# EAGLE board SparkFun RTK Facet LBand - Main-Panel (EAGLE 9.6.2), part 1 of 8
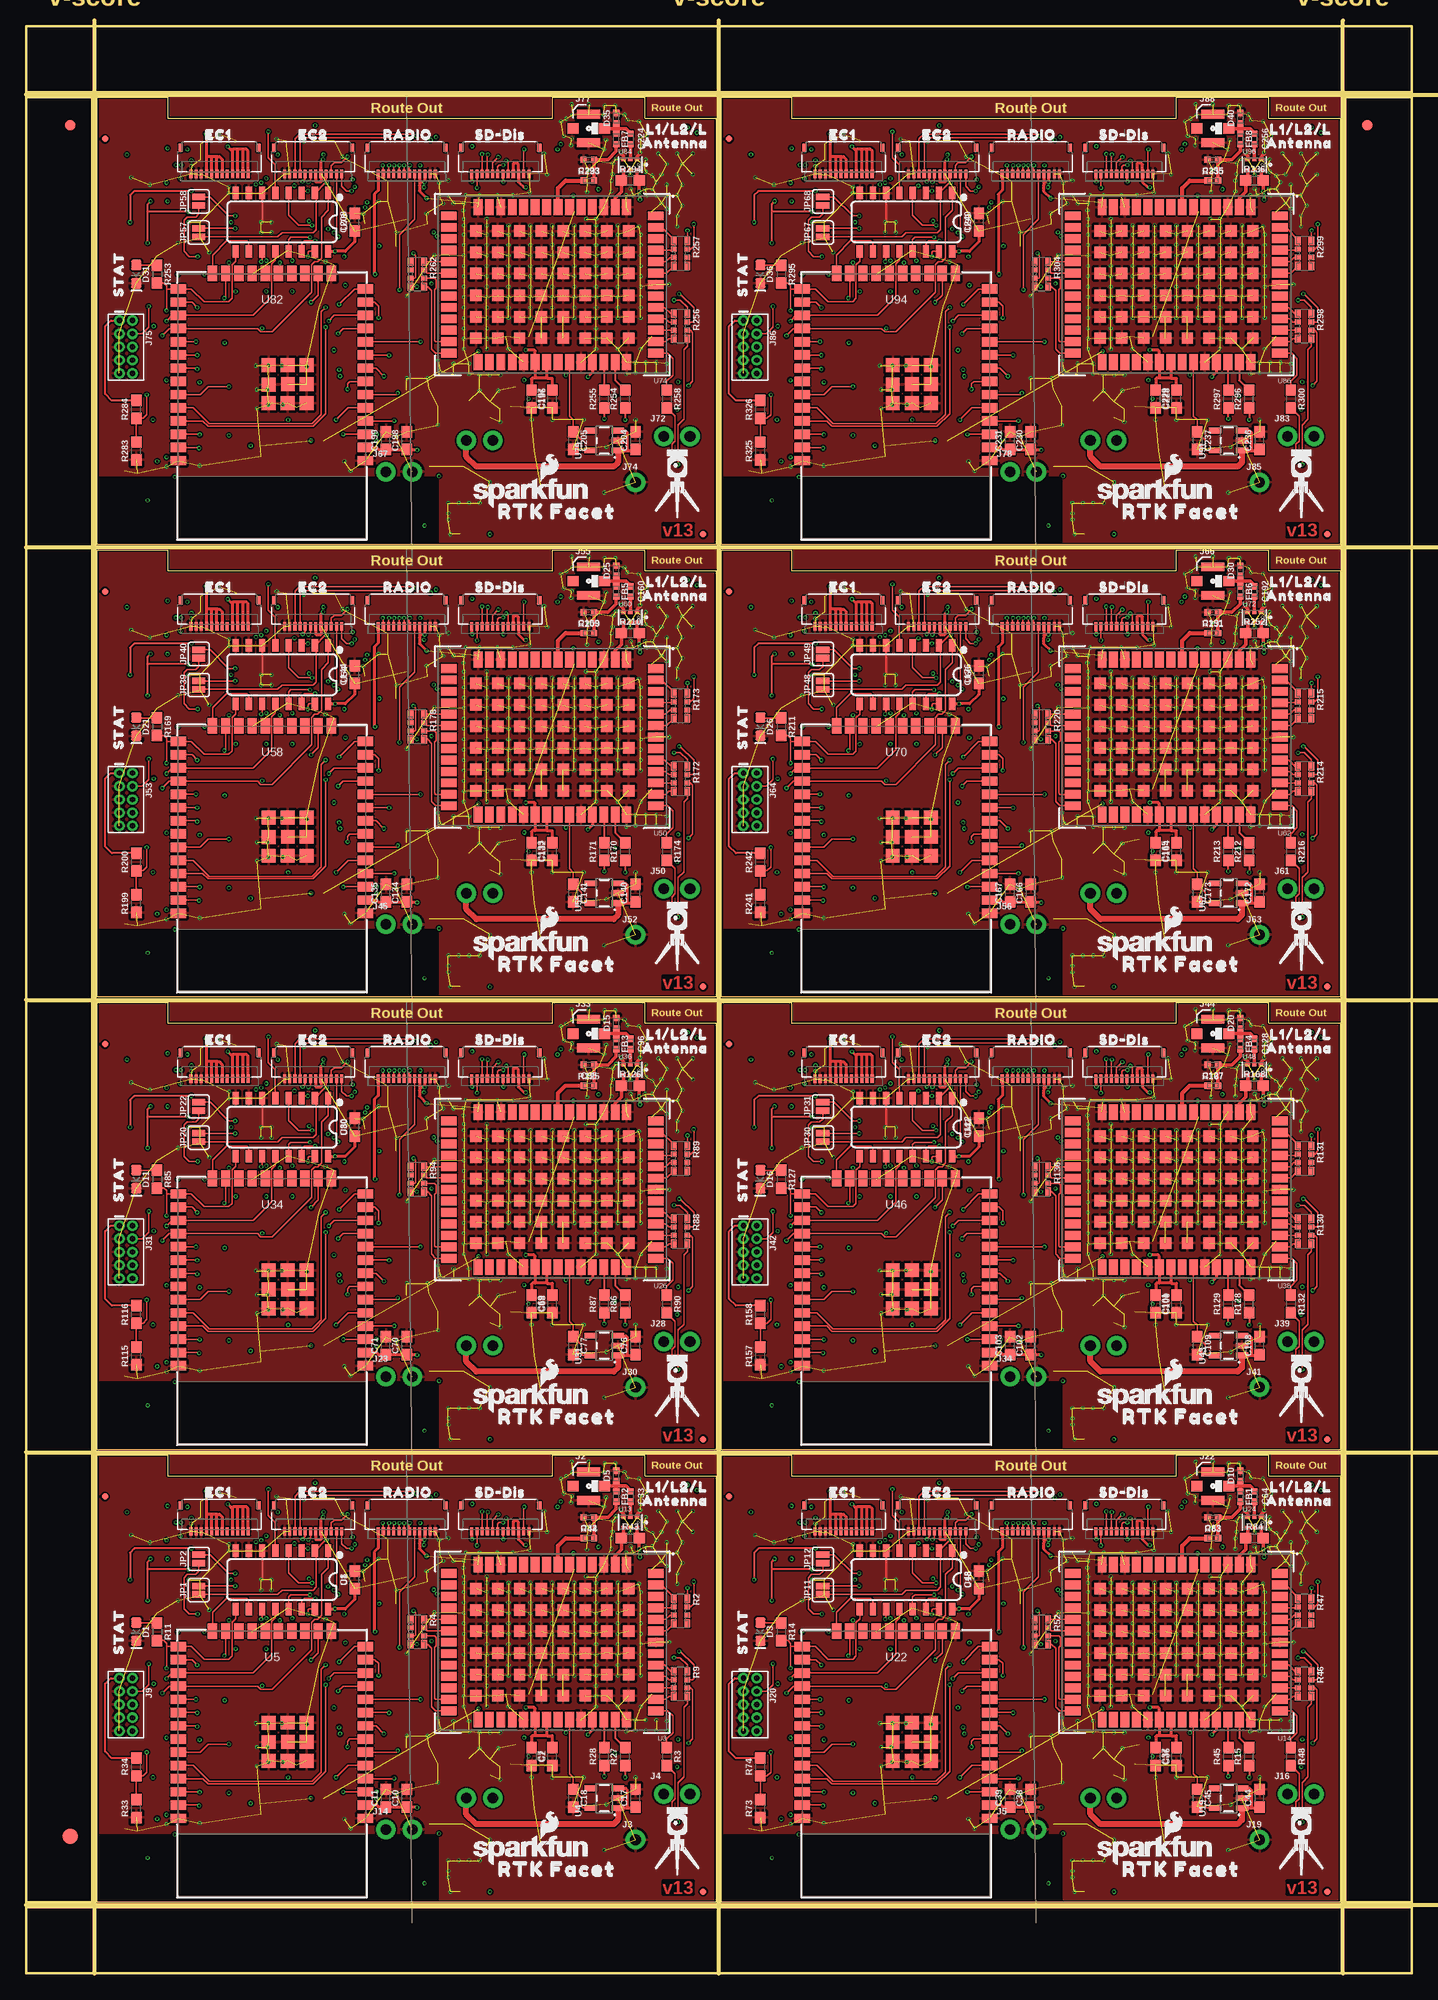
[diagram p0: board, top side]
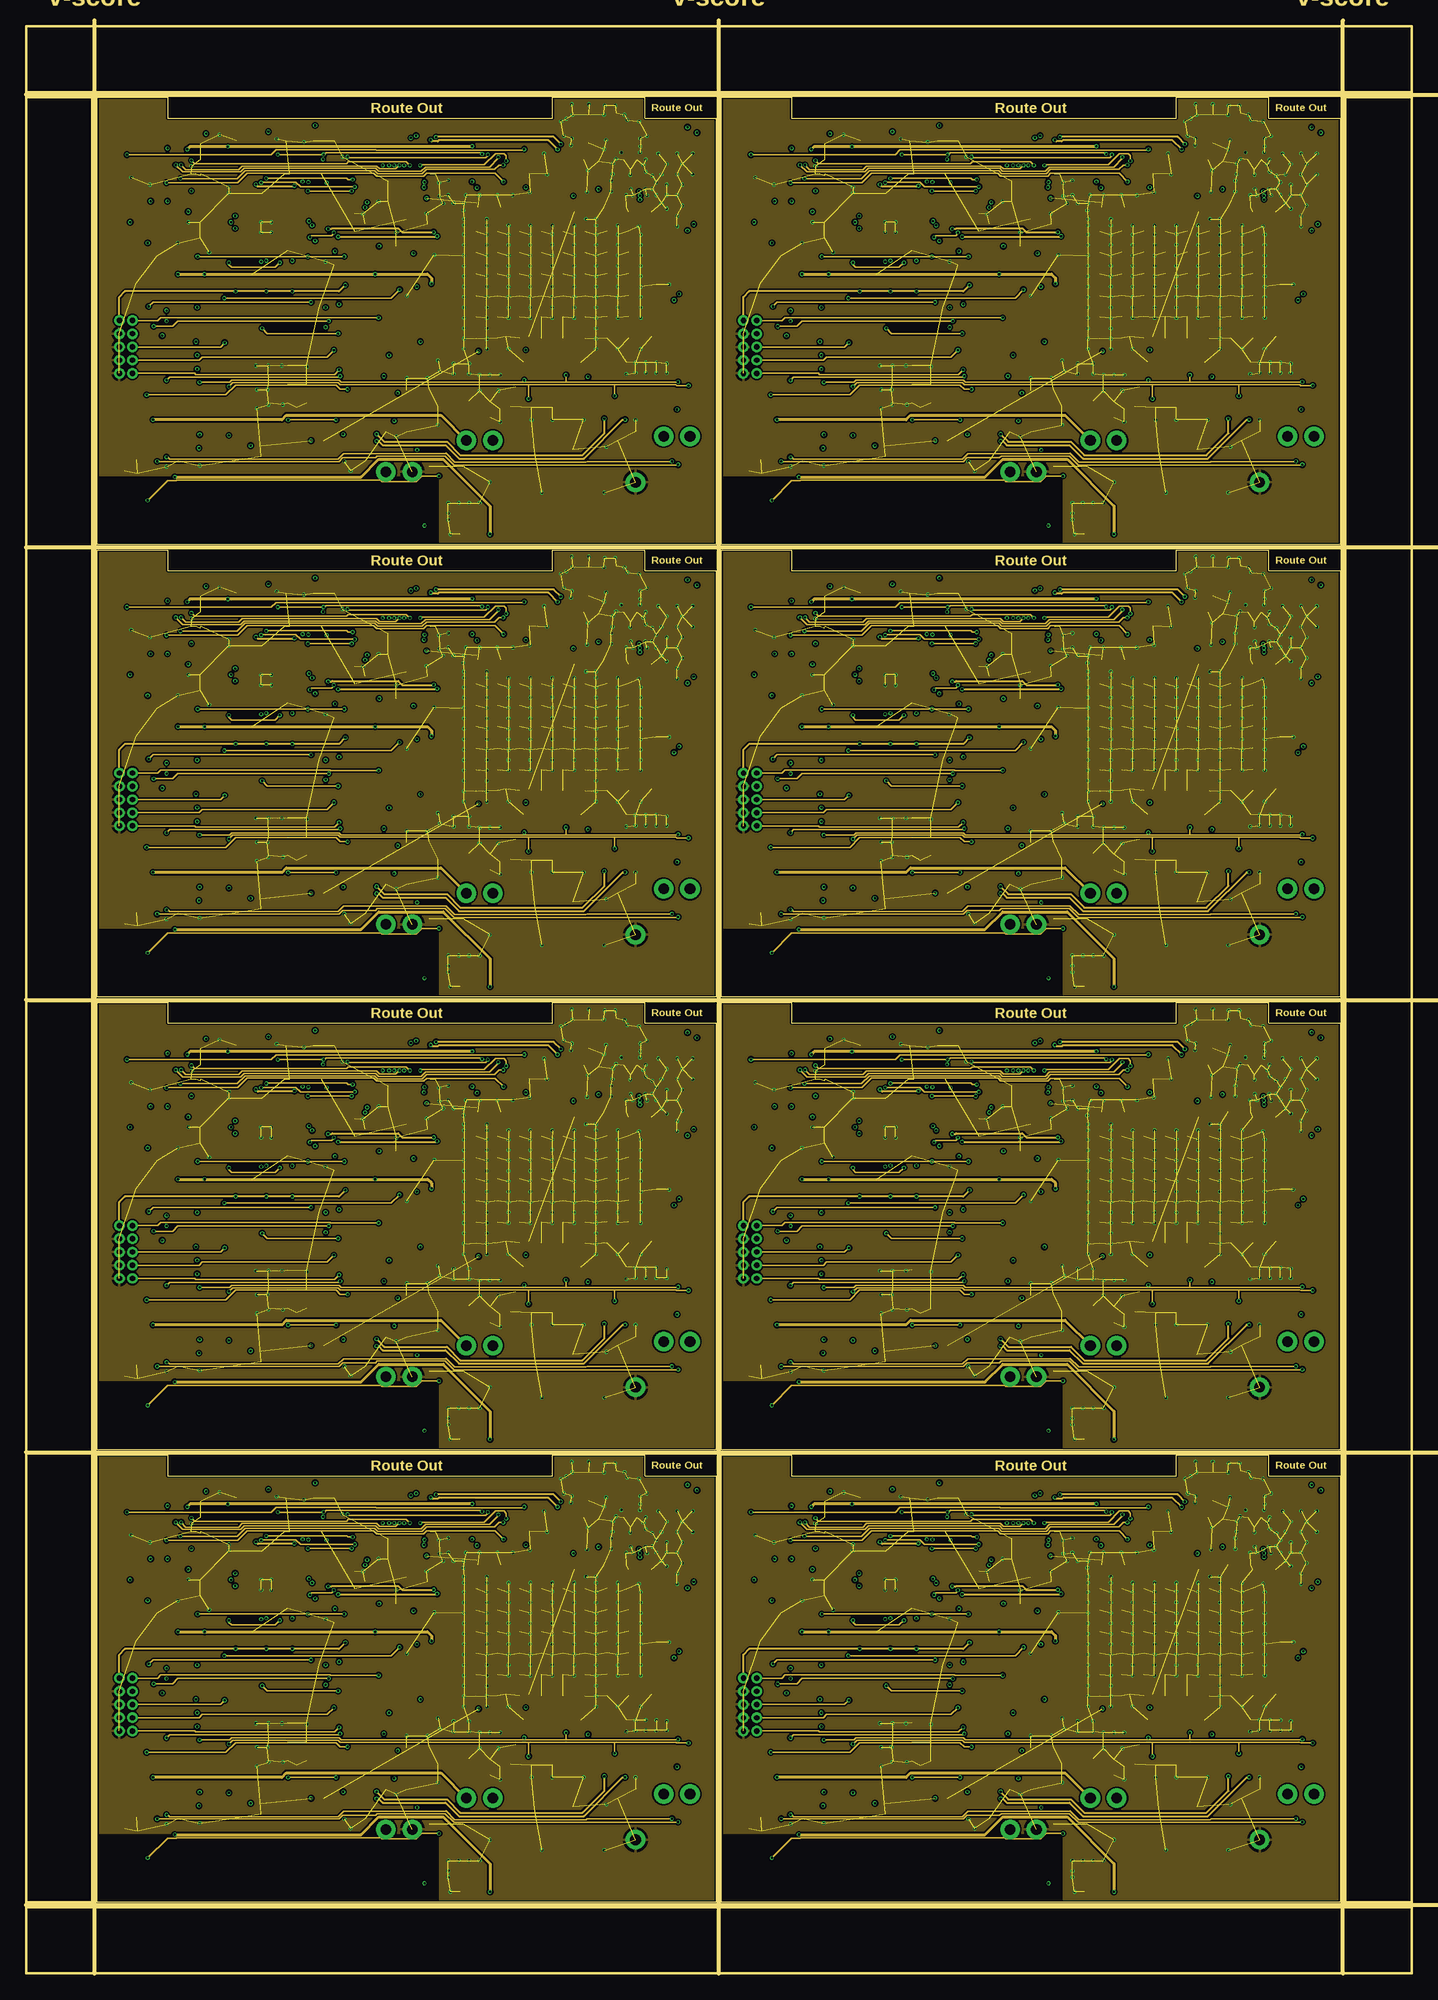
[diagram p1: board, inner layer Route2]
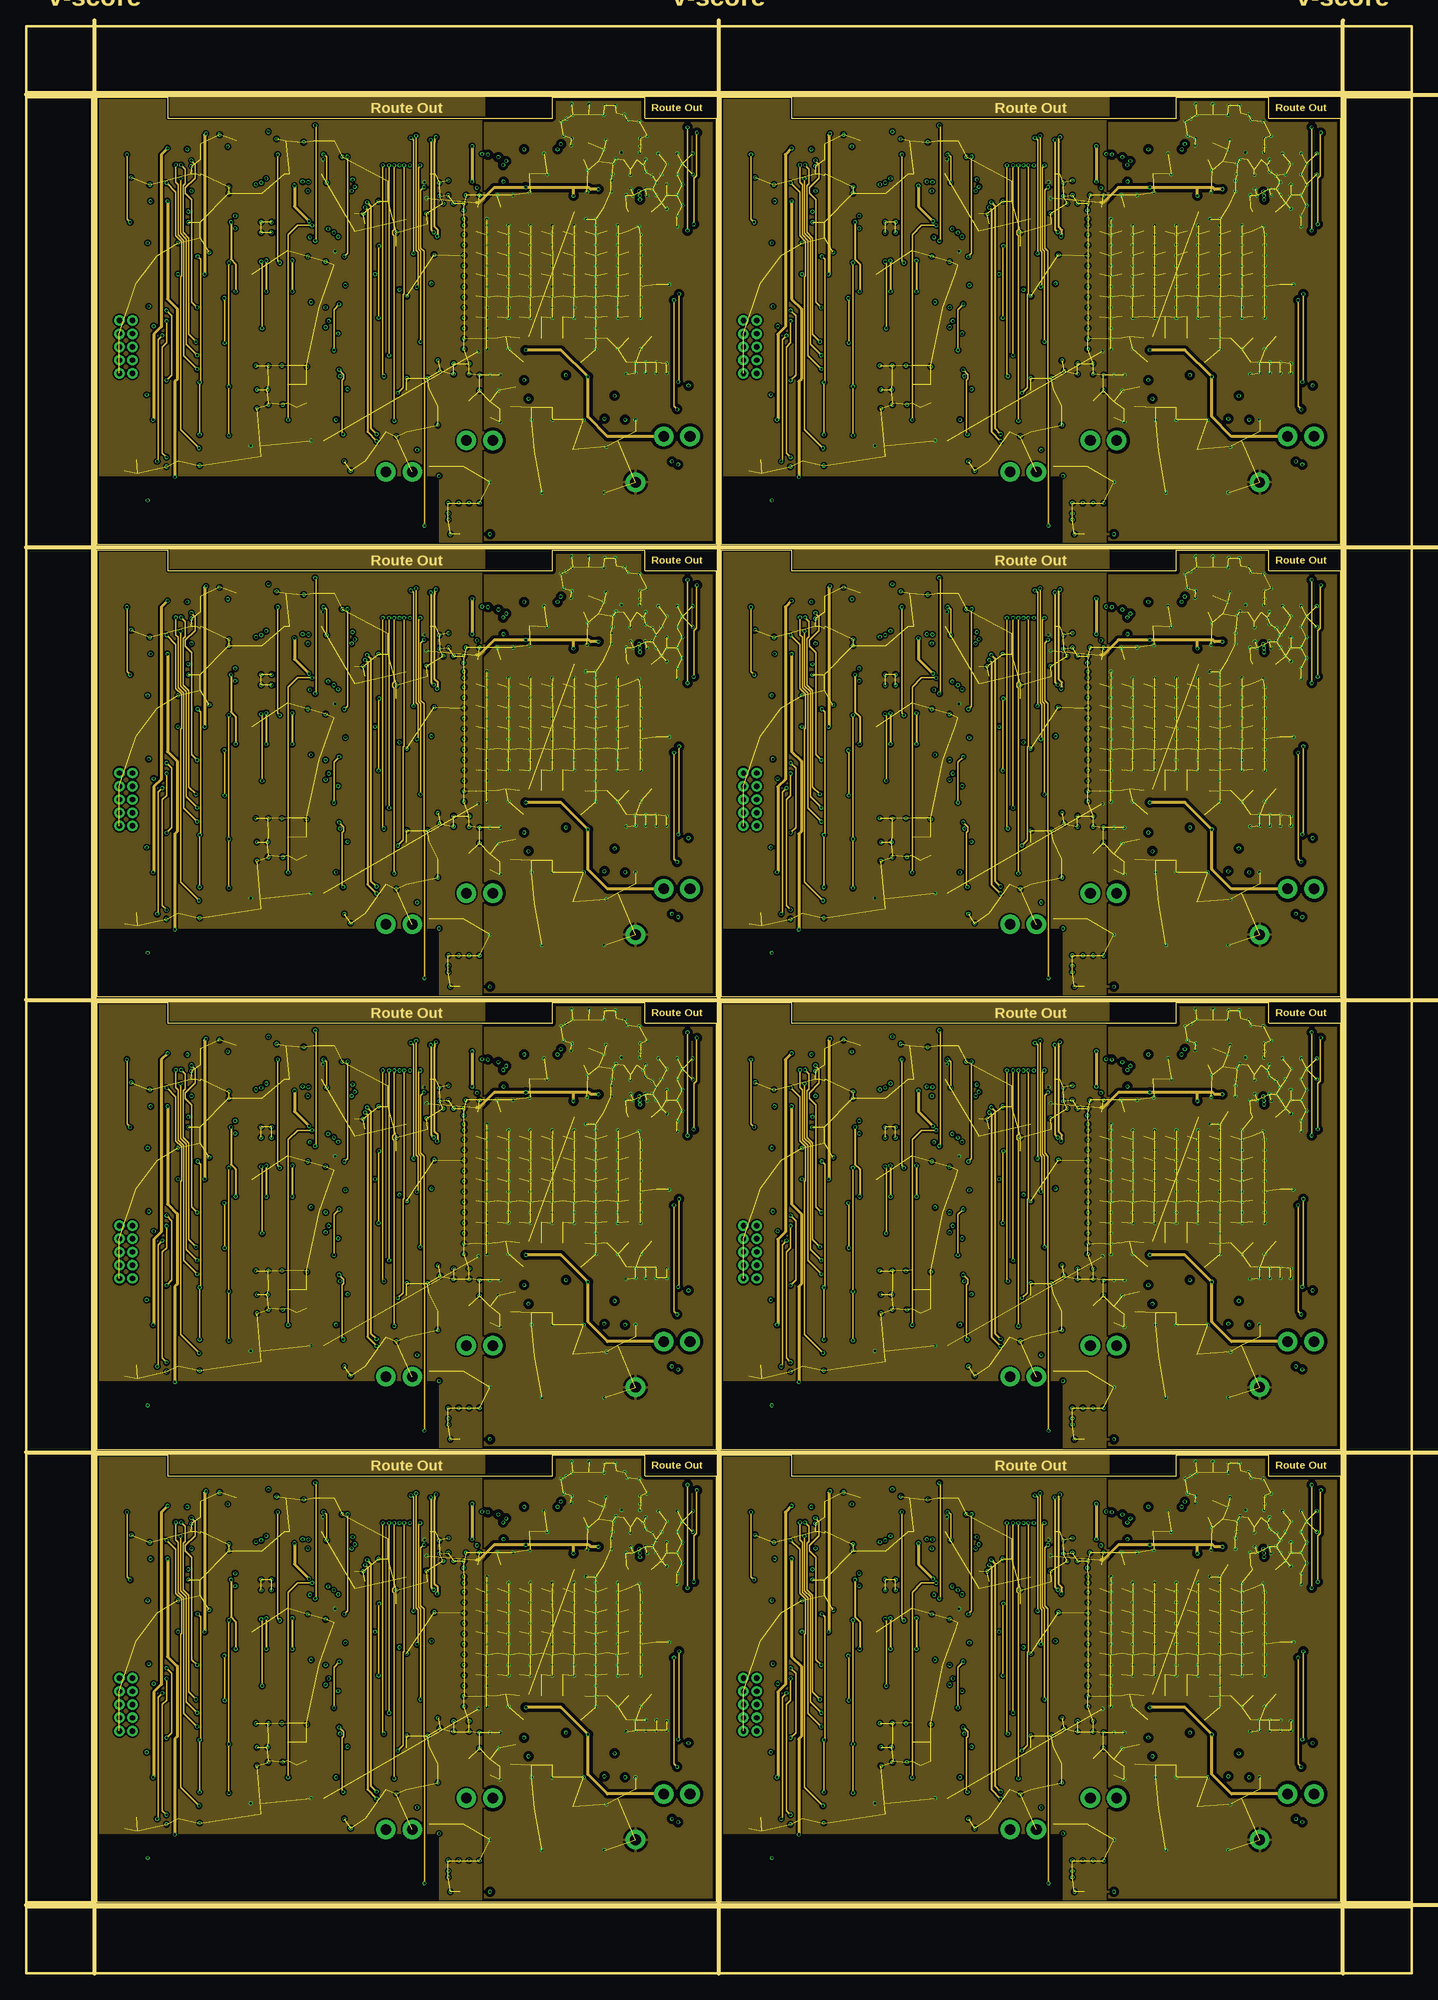
[diagram p2: board, inner layer Route15]
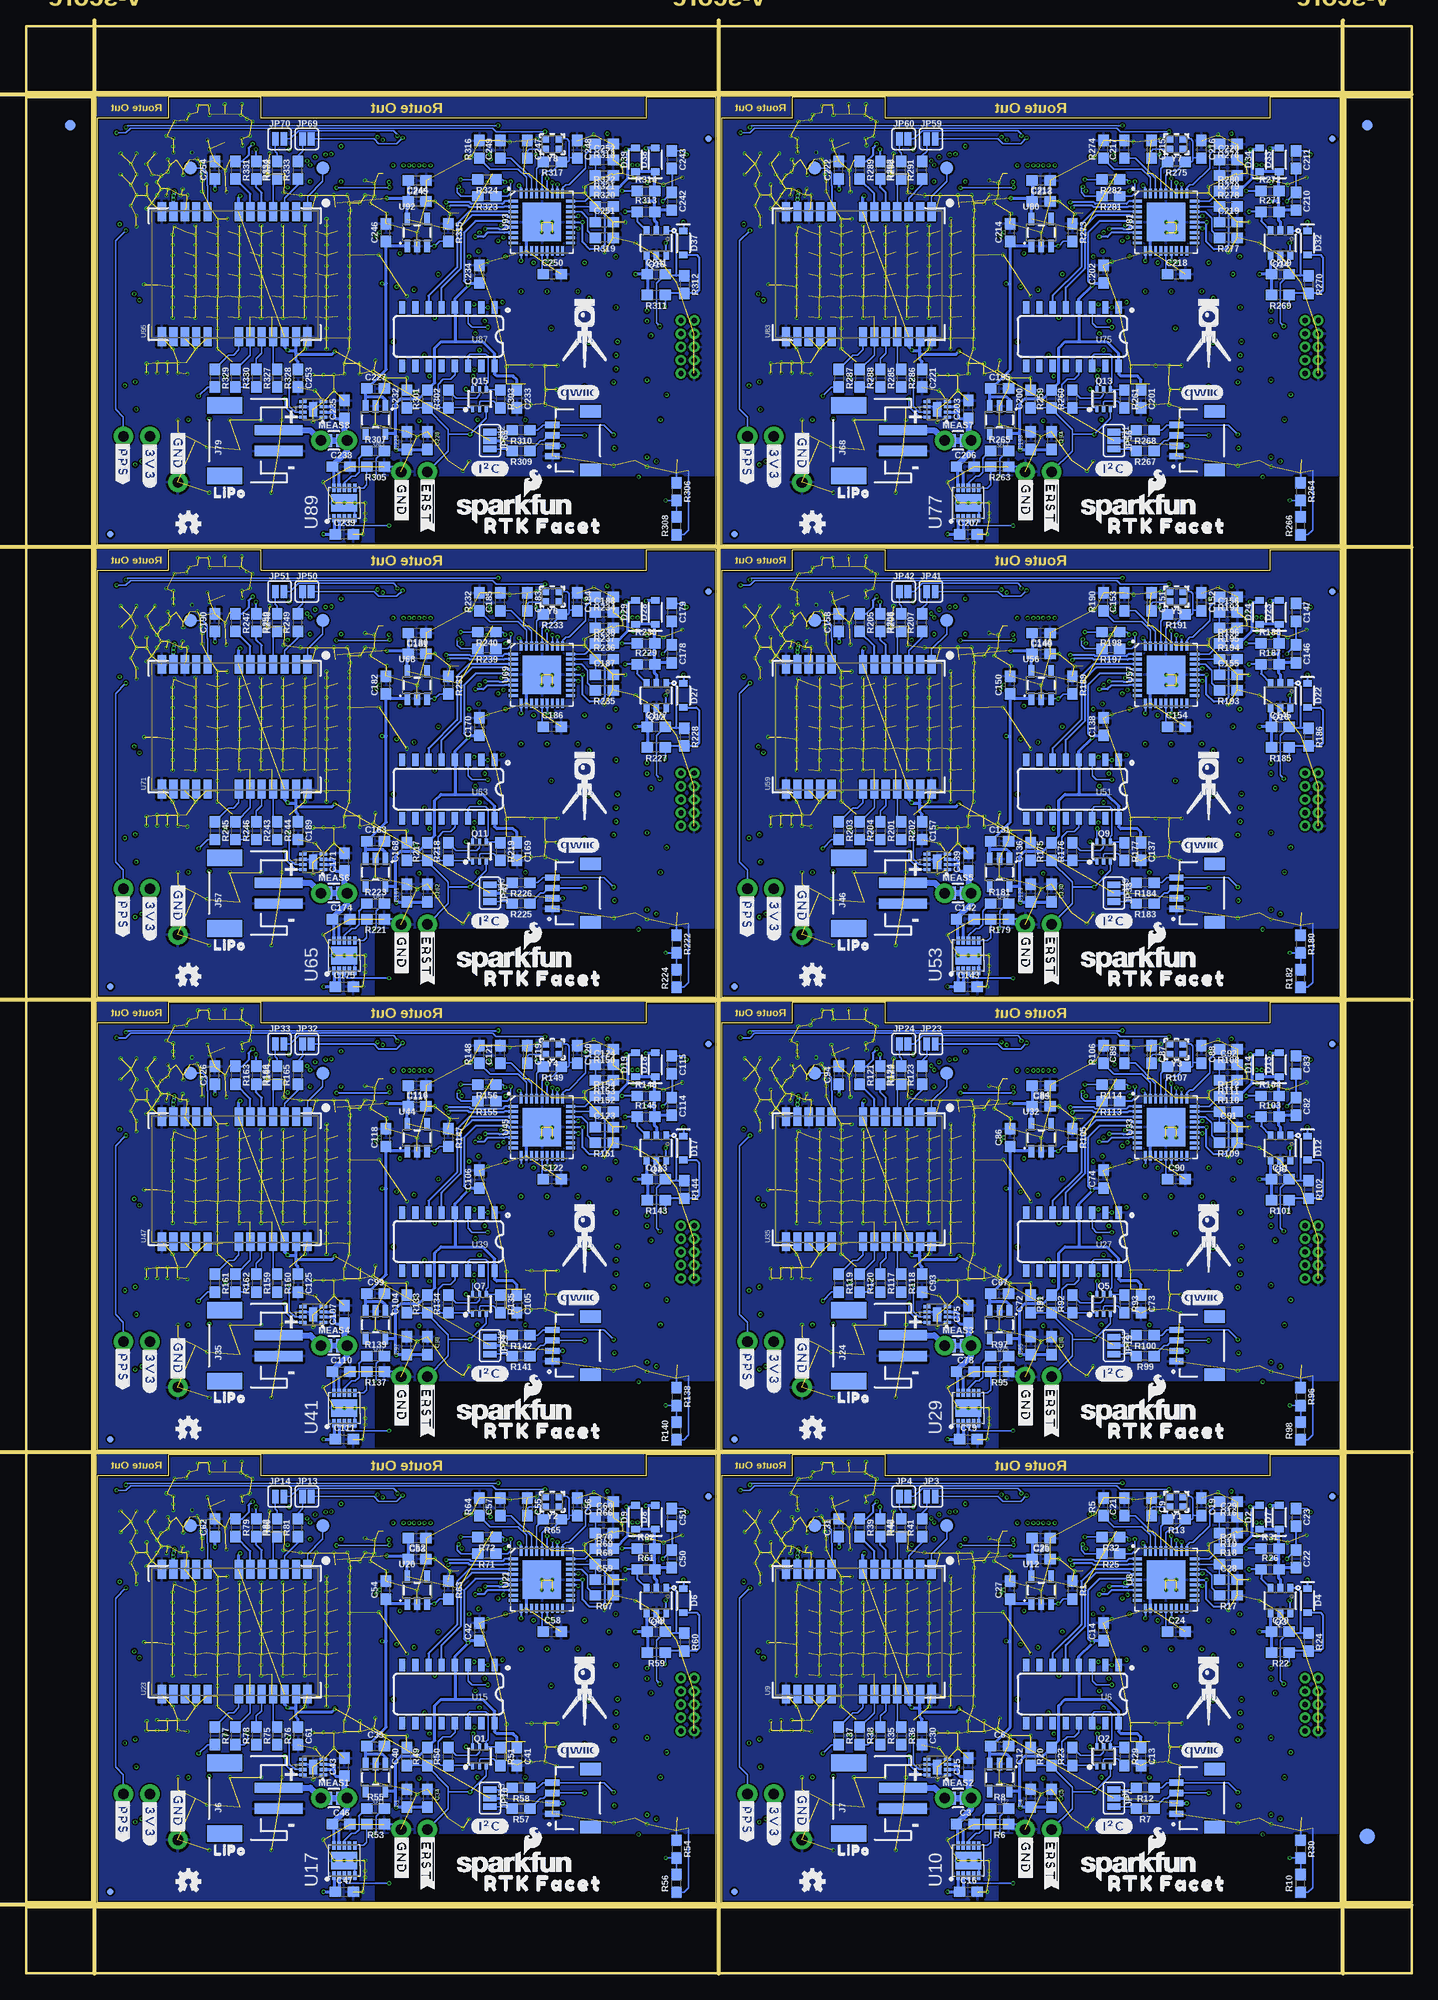
[diagram p3: board, bottom side, seen from below]

Size 133.22 x 187.24 mm. Coordinates in mm from the lower left corner, seen from the top.
Outline: 96 segments
Copper layers (1+2*15+16): Top 0.035mm / dielectric 1.5mm / Route2 0.035mm / dielectric 0.15mm / Route15 0.035mm / dielectric 0.2mm / Bottom 0.035mm
Design rules "SparkFun RTK Facet LBand - Main": minimum track width 4mil, minimum drill 0.2mm, track to track 4mil, track to pad 4mil, pad to pad 4mil, via to via 4mil, smd to smd 4mil, copper to edge 6mil, drill to drill 6mil, minimum pad ring 3mil, minimum via ring 3mil, stop-mask expansion 2.5mil, vias tented up to drill 25mil, thermal gap 10mil
Net classes: 0 default: width 0.127 mm; 1 power: width 0.178 mm; 2 supply: width 0.406 mm; 3 RF: width 0.33 mm; 4 USB: width 0.203 mm, clearance 0.127 mm
tKeepout: area 6.9,6.9 to 8.9,49.9; area 64.4,6.9 to 66.4,49.9; area 66.9,6.9 to 68.9,49.9; area 124.4,6.9 to 126.4,49.9; area 6.9,50.4 to 8.9,93.4; area 64.4,50.4 to 66.4,93.4; area 66.9,50.4 to 68.9,93.4; area 124.4,50.4 to 126.4,93.4; area 6.9,93.9 to 8.9,136.9; area 64.4,93.9 to 66.4,136.9; area 66.9,93.9 to 68.9,136.9; area 124.4,93.9 to 126.4,136.9; 4 more areas
bKeepout: area 6.8,6.9 to 8.8,49.9; area 64.3,6.9 to 66.3,49.9; area 66.8,6.9 to 68.8,49.9; area 124.3,6.9 to 126.3,49.9; area 6.8,50.4 to 8.8,93.4; area 64.3,50.4 to 66.3,93.4; area 66.8,50.4 to 68.8,93.4; area 124.3,50.4 to 126.3,93.4; area 6.8,93.9 to 8.8,136.9; area 64.3,93.9 to 66.3,136.9; area 66.8,93.9 to 68.8,136.9; area 124.3,93.9 to 126.3,136.9; 4 more areas
tRestrict: area 16,42.4 to 16.2,42.7; area 16.5,42.3 to 16.7,42.6; area 25,42.4 to 25.2,42.7; area 39,42.4 to 39.2,42.7; area 17,42.3 to 17.2,42.7; area 25.5,42.4 to 25.7,42.7; area 38.6,42.4 to 38.7,42.7; area 57.1,43.1 to 59.1,43.7; area 76,42.4 to 76.2,42.7; area 76.5,42.3 to 76.7,42.6; area 85,42.4 to 85.2,42.7; area 99,42.4 to 99.2,42.7; 52 more areas
Milling: 8 lines

## Footprints (pad centres in the part's own frame; a part is rotated, then mirrored left to right if it is on the bottom)
0603 = smd 1.1 x 1: 1 -0.85,0; 2 0.85,0
0402-TIGHT = smd 0.6 x 0.6: 1 -0.5,0; 2 0.5,0
LED-0603 = smd 1 x 1: A -0.877,0; C 0.877,0
SOD-323 = smd 0.63 x 0.83: A 1.15,0; C -1.15,0
FIDUCIAL-1X2 = smd 1 x 1: 1 0,0
FIDUCIAL-1.5X3 = smd 1.5 x 1.5: 1 0,0
JST04_1MM_RA = smd 0.6 x 1.35: 1 -1.5,0; 2 -0.5,0; 3 0.5,0; 4 1.5,0 | smd 1.2 x 2: NC1 2.8,-3.675; NC2 -2.8,-3.675
U.FL = smd 2.2 x 0.85: 1 0,1.375; 2 0,-1.375 | smd 1.05 x 1: FEED 1.525,0; NC -1.525,0
1X01_NO_SILK = drill 1.016 pad 1.88: 1 0,0
1X02_NO_SILK = drill 1.016 pad 1.88: 1 0,0; 2 2.54,0
JST-2-SMD = smd 1 x 4.6: 1 -1,-3.7; 2 1,-3.7 | smd 1.6 x 3.4: NC1 -3.4,1.5; NC2 3.4,1.5
FPC_12_DOUBLESIDED_BACKFLIP = smd 0.3 x 0.8: 1 -2.75,1.35; 2 -2.25,1.35; 3 -1.75,1.35; 4 -1.25,1.35; 5 -0.75,1.35; 6 -0.25,1.35; 7 0.25,1.35; 8 0.75,1.35; 9 1.25,1.35; 10 1.75,1.35; 11 2.25,1.35; 12 2.75,1.35 | smd 0.4 x 0.8: MP1 -3.75,-1.15; MP2 3.75,-1.15
2X5-PTH-1.27MM = drill 0.508 pad 1: 1 -2.54,-0.635; 2 -2.54,0.635; 3 -1.27,-0.635; 4 -1.27,0.635; 5 0,-0.635; 6 0,0.635; 7 1.27,-0.635; 8 1.27,0.635; 9 2.54,-0.635; 10 2.54,0.635
SMT-JUMPER_2_NO_SILK = smd 0.635 x 1.27: 1 -0.406,0; 2 0.406,0
FIDUCIAL-MICRO = smd 0.635 x 0.635: 1 0,0
SMT-JUMPER_3_NO_SILK = smd 0.635 x 1.27: 1 -0.813,0; 2 0,0; 3 0.813,0
COMBO-JUMPER_2_NC_TRACE = smd 0.635 x 1.27: 1 -0.508,0; 2 0.508,0 | drill 1.016 pad 1.88: 3 -1.27,0; 4 1.27,0
SC70-6 = smd 0.3 x 0.66: 1 -0.65,-0.92; 2 0,-0.92; 3 0.65,-0.92; 4 0.65,0.92; 5 0,0.92; 6 -0.65,0.92
SOT26 = smd 0.55 x 0.8: D1 -0.95,1.2; D2 0.95,1.2; G1 -0.95,-1.2; G2 0.95,-1.2; S1 0,1.2; S2 0,-1.2
1206_RA = smd 0.8 x 0.55: P1 -1.2,-0.62; P4 1.2,-0.62; P5 1.2,0.68; P8 -1.2,0.68 | smd 0.5 x 0.55: P2 -0.4,-0.62; P3 0.4,-0.62; P6 0.4,0.68; P7 -0.4,0.68
PAD.03X.05 = smd 1.27 x 1.27: 1 0,0
SO16 = smd 0.6 x 1.2: 1 -4.445,-2.8; 2 -3.175,-2.8; 3 -1.905,-2.8; 4 -0.635,-2.8; 5 0.635,-2.8; 6 1.905,-2.8; 7 3.175,-2.8; 8 4.445,-2.8; 9 4.445,2.8; 10 3.175,2.8; 11 1.905,2.8; 12 0.635,2.8; 13 -0.635,2.8; 14 -1.905,2.8; 15 -3.175,2.8; 16 -4.445,2.8
SOT23-5 = smd 0.55 x 1.2: 1 -0.95,-1.3; 2 0,-1.3; 3 0.95,-1.3; 4 0.95,1.3; 5 -0.95,1.3
ZED-F9P = smd 0.85 x 1.52: 1 -7.15,-7.45; 2 -6.05,-7.45; 3 -4.95,-7.45; 4 -3.85,-7.45; 5 -2.75,-7.45; 6 -1.65,-7.45; 7 -0.55,-7.45; 8 0.55,-7.45; 9 1.65,-7.45; 10 2.75,-7.45; 11 3.85,-7.45; 12 4.95,-7.45; 13 6.05,-7.45; 14 7.15,-7.45; 28 7.15,7.45; 29 6.05,7.45; 30 4.95,7.45; 31 3.85,7.45; 32 2.75,7.45; 33 1.65,7.45; 34 0.55,7.45; 35 -0.55,7.45; 36 -1.65,7.45; 37 -2.75,7.45; 38 -3.85,7.45; 39 -4.95,7.45; 40 -6.05,7.45; 41 -7.15,7.45 | smd 1.52 x 0.85: 15 9.95,-6.6; 16 9.95,-5.5; 17 9.95,-4.4; 18 9.95,-3.3; 19 9.95,-2.2; 20 9.95,-1.1; 21 9.95,0; 22 9.95,1.1; 23 9.95,2.2; 24 9.95,3.3; 25 9.95,4.4; 26 9.95,5.5; 27 9.95,6.6; 42 -9.95,6.6; 43 -9.95,5.5; 44 -9.95,4.4; 45 -9.95,3.3; 46 -9.95,2.2; 47 -9.95,1.1; 48 -9.95,0; 49 -9.95,-1.1; 50 -9.95,-2.2; 51 -9.95,-3.3; 52 -9.95,-4.4; 53 -9.95,-5.5; 54 -9.95,-6.6 | smd 1.1 x 1.1: 55 -1.05,-1.05; 56 -3.15,-1.05; 57 -5.25,-1.05; 58 -7.35,-1.05; 59 -1.05,-3.1; 60 -3.15,-3.1; 61 -5.25,-3.1; 62 -7.35,-3.1; 63 -1.05,-5.15; 64 -3.15,-5.15; 65 -5.25,-5.15; 66 -7.35,-5.15; 67 -1.05,5.15; 68 -3.15,5.15; 69 -5.25,5.15; 70 -7.35,5.15; 71 -1.05,3.1; 72 -3.15,3.1; 73 -5.25,3.1; 74 -7.35,3.1; 75 -1.05,1.05; 76 -3.15,1.05; 77 -5.25,1.05; 78 -7.35,1.05; 79 1.05,1.05; 80 3.15,1.05; 81 5.25,1.05; 82 7.35,1.05; 83 1.05,3.1; 84 3.15,3.1; 85 5.25,3.1; 86 7.35,3.1; 87 1.05,5.15; 88 3.15,5.15; 89 5.25,5.15; 90 7.35,5.15; 91 1.05,-5.15; 92 3.15,-5.15; 93 5.25,-5.15; 94 7.35,-5.15; 95 1.05,-3.1; 96 3.15,-3.1; 97 5.25,-3.1; 98 7.35,-3.1; 99 1.05,-1.05; 100 3.15,-1.05; 101 5.25,-1.05; 102 7.35,-1.05
ESP-WROOM-32D = smd 0.9 x 1.5: 1 6.43,9; 2 5.16,9; 3 3.89,9; 4 2.62,9; 5 1.35,9; 6 0.08,9; 7 -1.19,9; 8 -2.46,9; 9 -3.73,9; 10 -5,9; 11 -6.27,9; 12 -7.54,9; 13 -8.81,9; 14 -10.08,9; 25 -10.08,-9; 26 -8.81,-9; 27 -7.54,-9; 28 -6.27,-9; 29 -5,-9; 30 -3.73,-9; 31 -2.46,-9; 32 -1.19,-9; 33 0.08,-9; 34 1.35,-9; 35 2.62,-9; 36 3.89,-9; 37 5.16,-9; 38 6.43,-9 | smd 1.5 x 0.9: 15 -11.57,5.715; 16 -11.57,4.445; 17 -11.57,3.175; 18 -11.57,1.905; 19 -11.57,0.635; 20 -11.57,-0.635; 21 -11.57,-1.905; 22 -11.57,-3.175; 23 -11.57,-4.445; 24 -11.57,-5.715 | smd 1.33 x 1.33: GND -0.912,1.531; GNDT1 -2.751,3.346; GNDT2 -2.761,1.516; GNDT3 -2.751,-0.314; GNDT4 -0.891,-0.324; GNDT5 0.909,-0.314; GNDT6 0.909,1.516; GNDT7 0.909,3.346; GNDT8 -0.921,3.346
SO016 = smd 0.6 x 1.2: 1 -4.445,-2.8; 2 -3.175,-2.8; 3 -1.905,-2.8; 4 -0.635,-2.8; 5 0.635,-2.8; 6 1.905,-2.8; 7 3.175,-2.8; 8 4.445,-2.8; 9 4.445,2.8; 10 3.175,2.8; 11 1.905,2.8; 12 0.635,2.8; 13 -0.635,2.8; 14 -1.905,2.8; 15 -3.175,2.8; 16 -4.445,2.8
DFN-8 = smd 0.3 x 0.7: 1 -0.75,-0.99; 2 -0.25,-0.99; 3 0.25,-0.99; 4 0.75,-0.99; 5 0.75,0.99; 6 0.25,0.99; 7 -0.25,0.99; 8 -0.75,0.99 | smd 1.38 x 0.8: 9 0,0
QFN-36 = smd 0.9 x 0.28: 1 -2.75,2; 2 -2.75,1.5; 3 -2.75,1; 4 -2.75,0.5; 5 -2.75,0; 6 -2.75,-0.5; 7 -2.75,-1; 8 -2.75,-1.5; 9 -2.75,-2; 19 2.75,-2; 20 2.75,-1.5; 21 2.75,-1; 22 2.75,-0.5; 23 2.75,0; 24 2.75,0.5; 25 2.75,1; 26 2.75,1.5; 27 2.75,2 | smd 0.28 x 0.9: 10 -2,-2.75; 11 -1.5,-2.75; 12 -1,-2.75; 13 -0.5,-2.75; 14 0,-2.75; 15 0.5,-2.75; 16 1,-2.75; 17 1.5,-2.75; 18 2,-2.75; 28 2,2.75; 29 1.5,2.75; 30 1,2.75; 31 0.5,2.75; 32 0,2.75; 33 -0.5,2.75; 34 -1,2.75; 35 -1.5,2.75; 36 -2,2.75 | smd 3.7 x 3.7: EP 0,0
NEO-M9N/M8T/M8U/D9S = smd 1.8 x 0.8: 1 6,-7; 2 6,-5.9; 3 6,-4.8; 4 6,-3.7; 5 6,-2.6; 6 6,-1.5; 7 6,-0.4; 8 6,2.6; 9 6,3.7; 10 6,4.8; 11 6,5.9; 12 6,7; 13 -6,7; 14 -6,5.9; 15 -6,4.8; 16 -6,3.7; 17 -6,2.6; 18 -6,-0.4; 19 -6,-1.5; 20 -6,-2.6; 21 -6,-3.7; 22 -6,-4.8; 23 -6,-5.9; 24 -6,-7
DFN-10 = smd 0.8 x 0.35: 1 -1.45,1; 2 -1.45,0.5; 3 -1.45,0; 4 -1.45,-0.5; 5 -1.45,-1; 6 1.45,-1; 7 1.45,-0.5; 8 1.45,0; 9 1.45,0.5; 10 1.45,1 | smd 1.7 x 2.5: 11 0,0
PD0922J5050S2HF_ANA = smd 0.41 x 0.33: 1 0.65,0.483; 2 0,0.483; 3 -0.65,0.483; 4 -0.65,-0.483; 5 0,-0.483; 6 0.65,-0.483
CRYSTAL-SMD-2.0X1.6MM = smd 0.75 x 0.7: 1 -0.675,-0.5; 2 0.675,-0.5; 3 0.675,0.5; 4 -0.675,0.5

## Placement (x,y rotation side)
C1  1.0uF  [0603]  96.62,16.86 90 bottom
C2  1.0uF  [0603]  48.61,20.86 270 top
C3  4.7uF  [0603]  42.91,14.36 0 bottom
C4  1.0uF  [0603]  36.61,16.86 90 bottom
C5  0.1uF  [0603]  34.61,16.86 270 bottom
C6  1.0uF  [0603]  39.61,21.86 0 bottom
C7  0.1uF  [0603]  50.61,20.86 90 top
C8  0.1uF  [0603]  31.62,37.86 90 top
C9  18pF  [0603]  25.01,44.86 270 bottom
C10  10uF  [0603]  36.61,16.86 90 top
C11  0.1uF  [0603]  34.61,16.86 90 top
C12  0.1uF  [0603]  36.61,20.86 90 bottom
C13  0.1uF  [0603]  26.01,20.86 270 bottom
C14  10uF  [0603]  29.61,32.86 90 bottom
C15  0.1uF  [0603]  42.61,19.86 90 bottom
C16  4.7uF  [0603]  42.61,7.86 0 bottom
C17  1.0uF  [0603]  58.61,16.86 90 top
C18  1.0uF  [0603]  52.61,16.86 270 top
C19  18pF  [0603]  20.21,44.86 270 bottom
C20  10uF  [0603]  12.61,32.86 0 bottom
C21  0.1uF  [0603]  27.61,44.86 90 bottom
C22  0.1uF  [0603]  11.11,39.86 270 bottom
C23  0.1uF  [0603]  11.11,43.86 270 bottom
C24  0.1uF  [0603]  22.61,32.86 0 bottom
C25  1.0uF  [0603]  35.61,39.86 0 bottom
C26  0.1uF  [0603]  35.61,41.86 180 bottom
C27  1.0uF  [0603]  38.61,36.86 90 bottom
C28  0.1uF  [0603]  17.61,37.86 0 bottom
C29  0.1uF  [0603]  17.61,43.86 0 bottom
C30  1.0uF  [0603]  47.07,22.86 270 bottom
C31  1.0uF  [0603]  55.07,42.86 90 bottom
C32  47pF  [0402-TIGHT]  54.11,43.86 180 top
C33  47pF  [0402-TIGHT]  58.11,45.86 270 top
C34  0.1uF  [0603]  94.62,16.86 270 bottom
C35  1.0uF  [0603]  99.62,21.86 0 bottom
C36  1.0uF  [0603]  108.62,20.86 270 top
C37  0.1uF  [0603]  110.62,20.86 90 top
C38  10uF  [0603]  96.62,16.86 90 top
C39  0.1uF  [0603]  94.62,16.86 90 top
C40  0.1uF  [0603]  96.62,20.86 90 bottom
C41  0.1uF  [0603]  86.02,20.86 270 bottom
C42  10uF  [0603]  89.62,32.86 90 bottom
C43  0.1uF  [0603]  102.62,19.86 90 bottom
C44  1.0uF  [0603]  118.62,16.86 90 top
C45  1.0uF  [0603]  112.62,16.86 270 top
C46  4.7uF  [0603]  102.92,14.36 0 bottom
C47  4.7uF  [0603]  102.62,7.86 0 bottom
C48  0.1uF  [0603]  91.63,37.86 90 top
C49  10uF  [0603]  72.62,32.86 0 bottom
C50  0.1uF  [0603]  71.12,39.86 270 bottom
C51  0.1uF  [0603]  71.12,43.86 270 bottom
C52  1.0uF  [0603]  95.62,39.86 0 bottom
C53  0.1uF  [0603]  95.62,41.86 180 bottom
C54  1.0uF  [0603]  98.62,36.86 90 bottom
C55  18pF  [0603]  85.02,44.86 270 bottom
C56  18pF  [0603]  80.22,44.86 270 bottom
C57  0.1uF  [0603]  87.62,44.86 90 bottom
C58  0.1uF  [0603]  82.62,32.86 0 bottom
C59  0.1uF  [0603]  77.62,37.86 0 bottom
C60  0.1uF  [0603]  77.62,43.86 0 bottom
C61  1.0uF  [0603]  107.08,22.86 270 bottom
C62  1.0uF  [0603]  115.08,42.86 90 bottom
C63  47pF  [0402-TIGHT]  114.12,43.86 180 top
C64  47pF  [0402-TIGHT]  118.12,45.86 270 top
C65  1.0uF  [0603]  36.61,60.37 90 bottom
C66  0.1uF  [0603]  34.61,60.37 270 bottom
C67  1.0uF  [0603]  39.61,65.37 0 bottom
C68  1.0uF  [0603]  48.61,64.37 270 top
C69  0.1uF  [0603]  50.61,64.37 90 top
C70  10uF  [0603]  36.61,60.37 90 top
C71  0.1uF  [0603]  34.61,60.37 90 top
C72  0.1uF  [0603]  36.61,64.37 90 bottom
C73  0.1uF  [0603]  26.01,64.37 270 bottom
C74  10uF  [0603]  29.61,76.37 90 bottom
C75  0.1uF  [0603]  42.61,63.37 90 bottom
C76  1.0uF  [0603]  58.61,60.37 90 top
C77  1.0uF  [0603]  52.61,60.37 270 top
C78  4.7uF  [0603]  42.91,57.87 0 bottom
C79  4.7uF  [0603]  42.61,51.37 0 bottom
C80  0.1uF  [0603]  31.62,81.37 90 top
C81  10uF  [0603]  12.61,76.37 0 bottom
C82  0.1uF  [0603]  11.11,83.37 270 bottom
C83  0.1uF  [0603]  11.11,87.37 270 bottom
C84  1.0uF  [0603]  35.61,83.37 0 bottom
C85  0.1uF  [0603]  35.61,85.37 180 bottom
C86  1.0uF  [0603]  38.61,80.37 90 bottom
C87  18pF  [0603]  25.01,88.37 270 bottom
C88  18pF  [0603]  20.21,88.37 270 bottom
C89  0.1uF  [0603]  27.61,88.37 90 bottom
C90  0.1uF  [0603]  22.61,76.37 0 bottom
C91  0.1uF  [0603]  17.61,81.37 0 bottom
C92  0.1uF  [0603]  17.61,87.37 0 bottom
C93  1.0uF  [0603]  47.07,66.37 270 bottom
C94  1.0uF  [0603]  55.07,86.37 90 bottom
C95  47pF  [0402-TIGHT]  54.11,87.37 180 top
C96  47pF  [0402-TIGHT]  58.11,89.37 270 top
C97  1.0uF  [0603]  96.62,60.37 90 bottom
C98  0.1uF  [0603]  94.62,60.37 270 bottom
C99  1.0uF  [0603]  99.62,65.37 0 bottom
C100  1.0uF  [0603]  108.62,64.37 270 top
C101  0.1uF  [0603]  110.62,64.37 90 top
C102  10uF  [0603]  96.62,60.37 90 top
C103  0.1uF  [0603]  94.62,60.37 90 top
C104  0.1uF  [0603]  96.62,64.37 90 bottom
C105  0.1uF  [0603]  86.02,64.37 270 bottom
C106  10uF  [0603]  89.62,76.37 90 bottom
C107  0.1uF  [0603]  102.62,63.37 90 bottom
C108  1.0uF  [0603]  118.62,60.37 90 top
C109  1.0uF  [0603]  112.62,60.37 270 top
C110  4.7uF  [0603]  102.92,57.87 0 bottom
C111  4.7uF  [0603]  102.62,51.37 0 bottom
C112  0.1uF  [0603]  91.63,81.37 90 top
C113  10uF  [0603]  72.62,76.37 0 bottom
C114  0.1uF  [0603]  71.12,83.37 270 bottom
C115  0.1uF  [0603]  71.12,87.37 270 bottom
C116  1.0uF  [0603]  95.62,83.37 0 bottom
C117  0.1uF  [0603]  95.62,85.37 180 bottom
C118  1.0uF  [0603]  98.62,80.37 90 bottom
C119  18pF  [0603]  85.02,88.37 270 bottom
C120  18pF  [0603]  80.22,88.37 270 bottom
C121  0.1uF  [0603]  87.62,88.37 90 bottom
C122  0.1uF  [0603]  82.62,76.37 0 bottom
C123  0.1uF  [0603]  77.62,81.37 0 bottom
C124  0.1uF  [0603]  77.62,87.37 0 bottom
C125  1.0uF  [0603]  107.08,66.37 270 bottom
C126  1.0uF  [0603]  115.08,86.37 90 bottom
C127  47pF  [0402-TIGHT]  114.12,87.37 180 top
C128  47pF  [0402-TIGHT]  118.12,89.37 270 top
C129  1.0uF  [0603]  36.61,103.87 90 bottom
C130  0.1uF  [0603]  34.61,103.87 270 bottom
C131  1.0uF  [0603]  39.61,108.87 0 bottom
C132  1.0uF  [0603]  48.61,107.87 270 top
C133  0.1uF  [0603]  50.61,107.87 90 top
C134  10uF  [0603]  36.61,103.87 90 top
C135  0.1uF  [0603]  34.61,103.87 90 top
C136  0.1uF  [0603]  36.61,107.87 90 bottom
C137  0.1uF  [0603]  26.01,107.87 270 bottom
C138  10uF  [0603]  29.61,119.87 90 bottom
C139  0.1uF  [0603]  42.61,106.87 90 bottom
C140  1.0uF  [0603]  58.61,103.87 90 top
C141  1.0uF  [0603]  52.61,103.87 270 top
C142  4.7uF  [0603]  42.91,101.37 0 bottom
C143  4.7uF  [0603]  42.61,94.87 0 bottom
C144  0.1uF  [0603]  31.62,124.87 90 top
C145  10uF  [0603]  12.61,119.87 0 bottom
C146  0.1uF  [0603]  11.11,126.87 270 bottom
C147  0.1uF  [0603]  11.11,130.87 270 bottom
C148  1.0uF  [0603]  35.61,126.87 0 bottom
C149  0.1uF  [0603]  35.61,128.87 180 bottom
C150  1.0uF  [0603]  38.61,123.87 90 bottom
C151  18pF  [0603]  25.01,131.87 270 bottom
C152  18pF  [0603]  20.21,131.87 270 bottom
C153  0.1uF  [0603]  27.61,131.87 90 bottom
C154  0.1uF  [0603]  22.61,119.87 0 bottom
C155  0.1uF  [0603]  17.61,124.87 0 bottom
C156  0.1uF  [0603]  17.61,130.87 0 bottom
C157  1.0uF  [0603]  47.07,109.87 270 bottom
C158  1.0uF  [0603]  55.07,129.87 90 bottom
C159  47pF  [0402-TIGHT]  54.11,130.87 180 top
C160  47pF  [0402-TIGHT]  58.11,132.87 270 top
C161  1.0uF  [0603]  96.62,103.87 90 bottom
C162  0.1uF  [0603]  94.62,103.87 270 bottom
C163  1.0uF  [0603]  99.62,108.87 0 bottom
C164  1.0uF  [0603]  108.62,107.87 270 top
C165  0.1uF  [0603]  110.62,107.87 90 top
C166  10uF  [0603]  96.62,103.87 90 top
C167  0.1uF  [0603]  94.62,103.87 90 top
C168  0.1uF  [0603]  96.62,107.87 90 bottom
C169  0.1uF  [0603]  86.02,107.87 270 bottom
C170  10uF  [0603]  89.62,119.87 90 bottom
C171  0.1uF  [0603]  102.62,106.87 90 bottom
C172  1.0uF  [0603]  118.62,103.87 90 top
C173  1.0uF  [0603]  112.62,103.87 270 top
C174  4.7uF  [0603]  102.92,101.37 0 bottom
C175  4.7uF  [0603]  102.62,94.87 0 bottom
C176  0.1uF  [0603]  91.63,124.87 90 top
C177  10uF  [0603]  72.62,119.87 0 bottom
C178  0.1uF  [0603]  71.12,126.87 270 bottom
C179  0.1uF  [0603]  71.12,130.87 270 bottom
C180  1.0uF  [0603]  95.62,126.87 0 bottom
C181  0.1uF  [0603]  95.62,128.87 180 bottom
C182  1.0uF  [0603]  98.62,123.87 90 bottom
C183  18pF  [0603]  85.02,131.87 270 bottom
C184  18pF  [0603]  80.22,131.87 270 bottom
C185  0.1uF  [0603]  87.62,131.87 90 bottom
C186  0.1uF  [0603]  82.62,119.87 0 bottom
C187  0.1uF  [0603]  77.62,124.87 0 bottom
C188  0.1uF  [0603]  77.62,130.87 0 bottom
C189  1.0uF  [0603]  107.08,109.87 270 bottom
C190  1.0uF  [0603]  115.08,129.87 90 bottom
C191  47pF  [0402-TIGHT]  114.12,130.87 180 top
C192  47pF  [0402-TIGHT]  118.12,132.87 270 top
C193  1.0uF  [0603]  36.61,147.38 90 bottom
C194  0.1uF  [0603]  34.61,147.38 270 bottom
C195  1.0uF  [0603]  39.61,152.38 0 bottom
C196  1.0uF  [0603]  48.61,151.38 270 top
C197  0.1uF  [0603]  50.61,151.38 90 top
C198  10uF  [0603]  36.61,147.38 90 top
C199  0.1uF  [0603]  34.61,147.38 90 top
C200  0.1uF  [0603]  36.61,151.38 90 bottom
C201  0.1uF  [0603]  26.01,151.38 270 bottom
C202  10uF  [0603]  29.61,163.38 90 bottom
C203  0.1uF  [0603]  42.61,150.38 90 bottom
C204  1.0uF  [0603]  58.61,147.38 90 top
C205  1.0uF  [0603]  52.61,147.38 270 top
C206  4.7uF  [0603]  42.91,144.88 0 bottom
C207  4.7uF  [0603]  42.61,138.38 0 bottom
C208  0.1uF  [0603]  31.62,168.38 90 top
C209  10uF  [0603]  12.61,163.38 0 bottom
C210  0.1uF  [0603]  11.11,170.38 270 bottom
C211  0.1uF  [0603]  11.11,174.38 270 bottom
C212  1.0uF  [0603]  35.61,170.38 0 bottom
C213  0.1uF  [0603]  35.61,172.38 180 bottom
C214  1.0uF  [0603]  38.61,167.38 90 bottom
C215  18pF  [0603]  25.01,175.38 270 bottom
C216  18pF  [0603]  20.21,175.38 270 bottom
C217  0.1uF  [0603]  27.61,175.38 90 bottom
C218  0.1uF  [0603]  22.61,163.38 0 bottom
C219  0.1uF  [0603]  17.61,168.38 0 bottom
C220  0.1uF  [0603]  17.61,174.38 0 bottom
C221  1.0uF  [0603]  47.07,153.38 270 bottom
C222  1.0uF  [0603]  55.07,173.38 90 bottom
C223  47pF  [0402-TIGHT]  54.11,174.38 180 top
C224  47pF  [0402-TIGHT]  58.11,176.38 270 top
C225  1.0uF  [0603]  96.62,147.38 90 bottom
C226  0.1uF  [0603]  94.62,147.38 270 bottom
C227  1.0uF  [0603]  99.62,152.38 0 bottom
C228  1.0uF  [0603]  108.62,151.38 270 top
C229  0.1uF  [0603]  110.62,151.38 90 top
C230  10uF  [0603]  96.62,147.38 90 top
C231  0.1uF  [0603]  94.62,147.38 90 top
C232  0.1uF  [0603]  96.62,151.38 90 bottom
C233  0.1uF  [0603]  86.02,151.38 270 bottom
C234  10uF  [0603]  89.62,163.38 90 bottom
C235  0.1uF  [0603]  102.62,150.38 90 bottom
C236  1.0uF  [0603]  118.62,147.38 90 top
C237  1.0uF  [0603]  112.62,147.38 270 top
C238  4.7uF  [0603]  102.92,144.88 0 bottom
C239  4.7uF  [0603]  102.62,138.38 0 bottom
C240  0.1uF  [0603]  91.63,168.38 90 top
C241  10uF  [0603]  72.62,163.38 0 bottom
C242  0.1uF  [0603]  71.12,170.38 270 bottom
C243  0.1uF  [0603]  71.12,174.38 270 bottom
C244  1.0uF  [0603]  95.62,170.38 0 bottom
C245  0.1uF  [0603]  95.62,172.38 180 bottom
C246  1.0uF  [0603]  98.62,167.38 90 bottom
C247  18pF  [0603]  85.02,175.38 270 bottom
C248  18pF  [0603]  80.22,175.38 270 bottom
C249  0.1uF  [0603]  87.62,175.38 90 bottom
C250  0.1uF  [0603]  82.62,163.38 0 bottom
C251  0.1uF  [0603]  77.62,168.38 0 bottom
C252  0.1uF  [0603]  77.62,174.38 0 bottom
C253  1.0uF  [0603]  107.08,153.38 270 bottom
C254  1.0uF  [0603]  115.08,173.38 90 bottom
C255  47pF  [0402-TIGHT]  114.12,174.38 180 top
C256  47pF  [0402-TIGHT]  118.12,176.38 270 top
D1  Yellow  [LED-0603]  10.61,32.86 270 top
D2  3A/10V/280mV  [SOD-323]  14.61,43.86 90 bottom
D3  Yellow  [LED-0603]  70.62,32.86 270 top
D4  250mA/100V  [SOD-323]  10.01,35.86 270 bottom
D5  PESD0402  [0402-TIGHT]  56.75,47.86 90 top
D6  250mA/100V  [SOD-323]  70.02,35.86 270 bottom
D7  3A/10V/280mV  [SOD-323]  12.71,43.86 90 bottom
D8  3A/10V/280mV  [SOD-323]  72.72,43.86 90 bottom
D9  3A/10V/280mV  [SOD-323]  74.62,43.86 90 bottom
D10  PESD0402  [0402-TIGHT]  116.76,47.86 90 top
D11  Yellow  [LED-0603]  10.61,76.37 270 top
D12  250mA/100V  [SOD-323]  10.01,79.37 270 bottom
D13  3A/10V/280mV  [SOD-323]  12.71,87.37 90 bottom
D14  3A/10V/280mV  [SOD-323]  14.61,87.37 90 bottom
D15  PESD0402  [0402-TIGHT]  56.75,91.37 90 top
D16  Yellow  [LED-0603]  70.62,76.37 270 top
D17  250mA/100V  [SOD-323]  70.02,79.37 270 bottom
D18  3A/10V/280mV  [SOD-323]  72.72,87.37 90 bottom
D19  3A/10V/280mV  [SOD-323]  74.62,87.37 90 bottom
D20  PESD0402  [0402-TIGHT]  116.76,91.37 90 top
D21  Yellow  [LED-0603]  10.61,119.87 270 top
D22  250mA/100V  [SOD-323]  10.01,122.87 270 bottom
D23  3A/10V/280mV  [SOD-323]  12.71,130.87 90 bottom
D24  3A/10V/280mV  [SOD-323]  14.61,130.87 90 bottom
D25  PESD0402  [0402-TIGHT]  56.75,134.87 90 top
D26  Yellow  [LED-0603]  70.62,119.87 270 top
D27  250mA/100V  [SOD-323]  70.02,122.87 270 bottom
D28  3A/10V/280mV  [SOD-323]  72.72,130.87 90 bottom
D29  3A/10V/280mV  [SOD-323]  74.62,130.87 90 bottom
D30  PESD0402  [0402-TIGHT]  116.76,134.87 90 top
D31  Yellow  [LED-0603]  10.61,163.38 270 top
D32  250mA/100V  [SOD-323]  10.01,166.38 270 bottom
D33  3A/10V/280mV  [SOD-323]  12.71,174.38 90 bottom
D34  3A/10V/280mV  [SOD-323]  14.61,174.38 90 bottom
D35  PESD0402  [0402-TIGHT]  56.75,178.38 90 top
D36  Yellow  [LED-0603]  70.62,163.38 270 top
D37  250mA/100V  [SOD-323]  70.02,166.38 270 bottom
D38  3A/10V/280mV  [SOD-323]  72.72,174.38 90 bottom
D39  3A/10V/280mV  [SOD-323]  74.62,174.38 90 bottom
D40  PESD0402  [0402-TIGHT]  116.76,178.38 90 top
E$1  [FIDUCIAL-1X2]  4.23,177.72 0 top
E$2  [FIDUCIAL-1X2]  4.23,177.72 0 bottom
E$3  [FIDUCIAL-1X2]  128.99,177.72 0 top
E$4  [FIDUCIAL-1X2]  128.99,177.72 0 bottom
E$5  [FIDUCIAL-1.5X3]  4.23,13.21 0 top
E$6  [FIDUCIAL-1.5X3]  4.23,13.21 0 bottom
FB1  2.66Ω  [0402-TIGHT]  116.76,45.86 270 top
FB2  2.66Ω  [0402-TIGHT]  56.75,45.86 270 top
FB3  2.66Ω  [0402-TIGHT]  56.75,89.37 270 top
FB4  2.66Ω  [0402-TIGHT]  116.76,89.37 270 top
FB5  2.66Ω  [0402-TIGHT]  56.75,132.87 270 top
FB6  2.66Ω  [0402-TIGHT]  116.76,132.87 270 top
FB7  2.66Ω  [0402-TIGHT]  56.75,176.38 270 top
FB8  2.66Ω  [0402-TIGHT]  116.76,176.38 270 top
J1  QWIIC_RIGHT_ANGLE  [JST04_1MM_RA]  22.61,16.86 90 bottom
J2  U.FL  [U.FL]  54.11,46.86 0 top
J3  [1X01_NO_SILK]  58.61,12.86 0 top
J4  [1X02_NO_SILK]  61.31,17.26 0 top
J5  [1X02_NO_SILK]  94.62,13.86 0 top
J6  [JST-2-SMD]  112.62,16.86 90 bottom
J7  [JST-2-SMD]  52.61,16.86 90 bottom
J8  [FPC_12_DOUBLESIDED_BACKFLIP]  45.61,43.86 180 top
J9  CORTEX_JTAG_DEBUG_PTH  [2X5-PTH-1.27MM]  9.61,25.86 270 top
J10  [FPC_12_DOUBLESIDED_BACKFLIP]  36.61,43.86 180 top
J11  [FPC_12_DOUBLESIDED_BACKFLIP]  78.62,43.86 180 top
J12  [FPC_12_DOUBLESIDED_BACKFLIP]  87.62,43.86 180 top
J13  QWIIC_RIGHT_ANGLE  [JST04_1MM_RA]  82.62,16.86 90 bottom
J14  [1X02_NO_SILK]  34.61,13.86 0 top
J15  [FPC_12_DOUBLESIDED_BACKFLIP]  18.61,43.86 180 top
J16  [1X02_NO_SILK]  121.32,17.26 0 top
J17  [FPC_12_DOUBLESIDED_BACKFLIP]  105.62,43.86 180 top
J18  [FPC_12_DOUBLESIDED_BACKFLIP]  27.61,43.86 180 top
J19  [1X01_NO_SILK]  118.62,12.86 0 top
J20  CORTEX_JTAG_DEBUG_PTH  [2X5-PTH-1.27MM]  69.62,25.86 270 top
J21  [FPC_12_DOUBLESIDED_BACKFLIP]  96.62,43.86 180 top
J22  U.FL  [U.FL]  114.12,46.86 0 top
J23  [1X02_NO_SILK]  34.61,57.37 0 top
J24  [JST-2-SMD]  52.61,60.37 90 bottom
J25  [FPC_12_DOUBLESIDED_BACKFLIP]  18.61,87.37 180 top
J26  [FPC_12_DOUBLESIDED_BACKFLIP]  27.61,87.37 180 top
J27  QWIIC_RIGHT_ANGLE  [JST04_1MM_RA]  22.61,60.37 90 bottom
J28  [1X02_NO_SILK]  61.31,60.77 0 top
J29  [FPC_12_DOUBLESIDED_BACKFLIP]  45.61,87.37 180 top
J30  [1X01_NO_SILK]  58.61,56.37 0 top
J31  CORTEX_JTAG_DEBUG_PTH  [2X5-PTH-1.27MM]  9.61,69.37 270 top
J32  [FPC_12_DOUBLESIDED_BACKFLIP]  36.61,87.37 180 top
J33  U.FL  [U.FL]  54.11,90.37 0 top
J34  [1X02_NO_SILK]  94.62,57.37 0 top
J35  [JST-2-SMD]  112.62,60.37 90 bottom
J36  [FPC_12_DOUBLESIDED_BACKFLIP]  78.62,87.37 180 top
J37  [FPC_12_DOUBLESIDED_BACKFLIP]  87.62,87.37 180 top
J38  QWIIC_RIGHT_ANGLE  [JST04_1MM_RA]  82.62,60.37 90 bottom
J39  [1X02_NO_SILK]  121.32,60.77 0 top
J40  [FPC_12_DOUBLESIDED_BACKFLIP]  105.62,87.37 180 top
J41  [1X01_NO_SILK]  118.62,56.37 0 top
J42  CORTEX_JTAG_DEBUG_PTH  [2X5-PTH-1.27MM]  69.62,69.37 270 top
J43  [FPC_12_DOUBLESIDED_BACKFLIP]  96.62,87.37 180 top
J44  U.FL  [U.FL]  114.12,90.37 0 top
J45  [1X02_NO_SILK]  34.61,100.87 0 top
J46  [JST-2-SMD]  52.61,103.87 90 bottom
J47  [FPC_12_DOUBLESIDED_BACKFLIP]  18.61,130.87 180 top
J48  [FPC_12_DOUBLESIDED_BACKFLIP]  27.61,130.87 180 top
J49  QWIIC_RIGHT_ANGLE  [JST04_1MM_RA]  22.61,103.87 90 bottom
J50  [1X02_NO_SILK]  61.31,104.27 0 top
J51  [FPC_12_DOUBLESIDED_BACKFLIP]  45.61,130.87 180 top
J52  [1X01_NO_SILK]  58.61,99.87 0 top
J53  CORTEX_JTAG_DEBUG_PTH  [2X5-PTH-1.27MM]  9.61,112.87 270 top
J54  [FPC_12_DOUBLESIDED_BACKFLIP]  36.61,130.87 180 top
J55  U.FL  [U.FL]  54.11,133.87 0 top
J56  [1X02_NO_SILK]  94.62,100.87 0 top
J57  [JST-2-SMD]  112.62,103.87 90 bottom
J58  [FPC_12_DOUBLESIDED_BACKFLIP]  78.62,130.87 180 top
J59  [FPC_12_DOUBLESIDED_BACKFLIP]  87.62,130.87 180 top
J60  QWIIC_RIGHT_ANGLE  [JST04_1MM_RA]  82.62,103.87 90 bottom
J61  [1X02_NO_SILK]  121.32,104.27 0 top
J62  [FPC_12_DOUBLESIDED_BACKFLIP]  105.62,130.87 180 top
J63  [1X01_NO_SILK]  118.62,99.87 0 top
J64  CORTEX_JTAG_DEBUG_PTH  [2X5-PTH-1.27MM]  69.62,112.87 270 top
J65  [FPC_12_DOUBLESIDED_BACKFLIP]  96.62,130.87 180 top
J66  U.FL  [U.FL]  114.12,133.87 0 top
J67  [1X02_NO_SILK]  34.61,144.38 0 top
J68  [JST-2-SMD]  52.61,147.38 90 bottom
J69  [FPC_12_DOUBLESIDED_BACKFLIP]  18.61,174.38 180 top
J70  [FPC_12_DOUBLESIDED_BACKFLIP]  27.61,174.38 180 top
J71  QWIIC_RIGHT_ANGLE  [JST04_1MM_RA]  22.61,147.38 90 bottom
J72  [1X02_NO_SILK]  61.31,147.78 0 top
J73  [FPC_12_DOUBLESIDED_BACKFLIP]  45.61,174.38 180 top
J74  [1X01_NO_SILK]  58.61,143.38 0 top
J75  CORTEX_JTAG_DEBUG_PTH  [2X5-PTH-1.27MM]  9.61,156.38 270 top
J76  [FPC_12_DOUBLESIDED_BACKFLIP]  36.61,174.38 180 top
J77  U.FL  [U.FL]  54.11,177.38 0 top
J78  [1X02_NO_SILK]  94.62,144.38 0 top
J79  [JST-2-SMD]  112.62,147.38 90 bottom
J80  [FPC_12_DOUBLESIDED_BACKFLIP]  78.62,174.38 180 top
J81  [FPC_12_DOUBLESIDED_BACKFLIP]  87.62,174.38 180 top
J82  QWIIC_RIGHT_ANGLE  [JST04_1MM_RA]  82.62,147.38 90 bottom
J83  [1X02_NO_SILK]  121.32,147.78 0 top
J84  [FPC_12_DOUBLESIDED_BACKFLIP]  105.62,174.38 180 top
J85  [1X01_NO_SILK]  118.62,143.38 0 top
J86  CORTEX_JTAG_DEBUG_PTH  [2X5-PTH-1.27MM]  69.62,156.38 270 top
J87  [FPC_12_DOUBLESIDED_BACKFLIP]  96.62,174.38 180 top
J88  U.FL  [U.FL]  114.12,177.38 0 top
JP1  [SMT-JUMPER_2_NO_SILK]  16.61,36.86 90 top
JP2  [SMT-JUMPER_2_NO_SILK]  16.61,39.86 90 top
JP3  [SMT-JUMPER_2_NO_SILK]  46.21,45.86 0 bottom
JP4  [SMT-JUMPER_2_NO_SILK]  48.83,45.86 0 bottom
JP5  FIDUCIALUFIDUCIAL  [FIDUCIAL-MICRO]  125.12,7.86 0 top
JP6  FIDUCIALUFIDUCIAL  [FIDUCIAL-MICRO]  67.62,45.86 0 top
JP7  JUMPER-SMT_3_NO_SILK  [SMT-JUMPER_3_NO_SILK]  28.61,16.86 270 bottom
JP8  FIDUCIALUFIDUCIAL  [FIDUCIAL-MICRO]  125.12,7.86 0 bottom
JP9  FIDUCIALUFIDUCIAL  [FIDUCIAL-MICRO]  67.62,45.86 0 bottom
JP10  JUMPER-SMT_3_NO_SILK  [SMT-JUMPER_3_NO_SILK]  88.62,16.86 270 bottom
JP11  [SMT-JUMPER_2_NO_SILK]  76.62,36.86 90 top
JP12  [SMT-JUMPER_2_NO_SILK]  76.62,39.86 90 top
JP13  [SMT-JUMPER_2_NO_SILK]  106.22,45.86 0 bottom
JP14  [SMT-JUMPER_2_NO_SILK]  108.84,45.86 0 bottom
JP15  FIDUCIALUFIDUCIAL  [FIDUCIAL-MICRO]  65.11,51.37 0 top
JP16  FIDUCIALUFIDUCIAL  [FIDUCIAL-MICRO]  7.61,89.37 0 top
JP17  FIDUCIALUFIDUCIAL  [FIDUCIAL-MICRO]  65.11,51.37 0 bottom
JP18  FIDUCIALUFIDUCIAL  [FIDUCIAL-MICRO]  7.61,89.37 0 bottom
JP19  JUMPER-SMT_3_NO_SILK  [SMT-JUMPER_3_NO_SILK]  28.61,60.37 270 bottom
JP20  [SMT-JUMPER_2_NO_SILK]  16.61,80.37 90 top
JP21  FIDUCIALUFIDUCIAL  [FIDUCIAL-MICRO]  65.11,7.86 0 top
JP22  [SMT-JUMPER_2_NO_SILK]  16.61,83.37 90 top
JP23  [SMT-JUMPER_2_NO_SILK]  46.21,89.37 0 bottom
JP24  [SMT-JUMPER_2_NO_SILK]  48.83,89.37 0 bottom
JP25  FIDUCIALUFIDUCIAL  [FIDUCIAL-MICRO]  125.12,51.37 0 top
JP26  FIDUCIALUFIDUCIAL  [FIDUCIAL-MICRO]  67.62,89.37 0 top
JP27  FIDUCIALUFIDUCIAL  [FIDUCIAL-MICRO]  125.12,51.37 0 bottom
JP28  FIDUCIALUFIDUCIAL  [FIDUCIAL-MICRO]  67.62,89.37 0 bottom
JP29  JUMPER-SMT_3_NO_SILK  [SMT-JUMPER_3_NO_SILK]  88.62,60.37 270 bottom
JP30  [SMT-JUMPER_2_NO_SILK]  76.62,80.37 90 top
JP31  [SMT-JUMPER_2_NO_SILK]  76.62,83.37 90 top
JP32  [SMT-JUMPER_2_NO_SILK]  106.22,89.37 0 bottom
JP33  [SMT-JUMPER_2_NO_SILK]  108.84,89.37 0 bottom
JP34  FIDUCIALUFIDUCIAL  [FIDUCIAL-MICRO]  65.11,94.87 0 top
JP35  FIDUCIALUFIDUCIAL  [FIDUCIAL-MICRO]  7.61,132.87 0 top
JP36  FIDUCIALUFIDUCIAL  [FIDUCIAL-MICRO]  65.11,94.87 0 bottom
JP37  FIDUCIALUFIDUCIAL  [FIDUCIAL-MICRO]  7.61,132.87 0 bottom
JP38  JUMPER-SMT_3_NO_SILK  [SMT-JUMPER_3_NO_SILK]  28.61,103.87 270 bottom
JP39  [SMT-JUMPER_2_NO_SILK]  16.61,123.87 90 top
JP40  [SMT-JUMPER_2_NO_SILK]  16.61,126.87 90 top
JP41  [SMT-JUMPER_2_NO_SILK]  46.21,132.87 0 bottom
JP42  [SMT-JUMPER_2_NO_SILK]  48.83,132.87 0 bottom
JP43  FIDUCIALUFIDUCIAL  [FIDUCIAL-MICRO]  125.12,94.87 0 top
JP44  FIDUCIALUFIDUCIAL  [FIDUCIAL-MICRO]  67.62,132.87 0 top
JP45  FIDUCIALUFIDUCIAL  [FIDUCIAL-MICRO]  125.12,94.87 0 bottom
JP46  FIDUCIALUFIDUCIAL  [FIDUCIAL-MICRO]  67.62,132.87 0 bottom
JP47  JUMPER-SMT_3_NO_SILK  [SMT-JUMPER_3_NO_SILK]  88.62,103.87 270 bottom
JP48  [SMT-JUMPER_2_NO_SILK]  76.62,123.87 90 top
JP49  [SMT-JUMPER_2_NO_SILK]  76.62,126.87 90 top
JP50  [SMT-JUMPER_2_NO_SILK]  106.22,132.87 0 bottom
JP51  [SMT-JUMPER_2_NO_SILK]  108.84,132.87 0 bottom
JP52  FIDUCIALUFIDUCIAL  [FIDUCIAL-MICRO]  65.11,138.38 0 top
JP53  FIDUCIALUFIDUCIAL  [FIDUCIAL-MICRO]  7.61,176.38 0 top
JP54  FIDUCIALUFIDUCIAL  [FIDUCIAL-MICRO]  65.11,138.38 0 bottom
JP55  FIDUCIALUFIDUCIAL  [FIDUCIAL-MICRO]  7.61,176.38 0 bottom
JP56  JUMPER-SMT_3_NO_SILK  [SMT-JUMPER_3_NO_SILK]  28.61,147.38 270 bottom
JP57  [SMT-JUMPER_2_NO_SILK]  16.61,167.38 90 top
JP58  [SMT-JUMPER_2_NO_SILK]  16.61,170.38 90 top
JP59  [SMT-JUMPER_2_NO_SILK]  46.21,176.38 0 bottom
JP60  [SMT-JUMPER_2_NO_SILK]  48.83,176.38 0 bottom
JP61  FIDUCIALUFIDUCIAL  [FIDUCIAL-MICRO]  7.61,45.86 0 top
JP62  FIDUCIALUFIDUCIAL  [FIDUCIAL-MICRO]  125.12,138.38 0 top
JP63  FIDUCIALUFIDUCIAL  [FIDUCIAL-MICRO]  67.62,176.38 0 top
JP64  FIDUCIALUFIDUCIAL  [FIDUCIAL-MICRO]  125.12,138.38 0 bottom
JP65  FIDUCIALUFIDUCIAL  [FIDUCIAL-MICRO]  67.62,176.38 0 bottom
JP66  JUMPER-SMT_3_NO_SILK  [SMT-JUMPER_3_NO_SILK]  88.62,147.38 270 bottom
JP67  [SMT-JUMPER_2_NO_SILK]  76.62,167.38 90 top
JP68  [SMT-JUMPER_2_NO_SILK]  76.62,170.38 90 top
JP69  [SMT-JUMPER_2_NO_SILK]  106.22,176.38 0 bottom
JP70  [SMT-JUMPER_2_NO_SILK]  108.84,176.38 0 bottom
JP71  FIDUCIALUFIDUCIAL  [FIDUCIAL-MICRO]  65.11,7.86 0 bottom
JP81  FIDUCIALUFIDUCIAL  [FIDUCIAL-MICRO]  7.61,45.86 0 bottom
LOGO1  OSHW-LOGOMINI  [OSHW-LOGO-MINI]  57.61,8.86 0 bottom
LOGO2  SFE_LOGO_NAME_FLAME.1_INCH  [SFE_LOGO_NAME_FLAME_.1]  48.61,11.86 0 top
LOGO3  SFE_LOGO_NAME_FLAME.1_INCH  [SFE_LOGO_NAME_FLAME_.1]  26.21,10.36 0 bottom
LOGO4  OSHW-LOGOMINI  [OSHW-LOGO-MINI]  117.62,8.86 0 bottom
LOGO5  SFE_LOGO_NAME_FLAME.1_INCH  [SFE_LOGO_NAME_FLAME_.1]  108.62,11.86 0 top
LOGO6  SFE_LOGO_NAME_FLAME.1_INCH  [SFE_LOGO_NAME_FLAME_.1]  86.22,10.36 0 bottom
LOGO7  OSHW-LOGOMINI  [OSHW-LOGO-MINI]  57.61,52.37 0 bottom
LOGO8  SFE_LOGO_NAME_FLAME.1_INCH  [SFE_LOGO_NAME_FLAME_.1]  48.61,55.37 0 top
LOGO9  SFE_LOGO_NAME_FLAME.1_INCH  [SFE_LOGO_NAME_FLAME_.1]  26.21,53.87 0 bottom
LOGO10  OSHW-LOGOMINI  [OSHW-LOGO-MINI]  117.62,52.37 0 bottom
LOGO11  SFE_LOGO_NAME_FLAME.1_INCH  [SFE_LOGO_NAME_FLAME_.1]  108.62,55.37 0 top
LOGO12  SFE_LOGO_NAME_FLAME.1_INCH  [SFE_LOGO_NAME_FLAME_.1]  86.22,53.87 0 bottom
LOGO13  OSHW-LOGOMINI  [OSHW-LOGO-MINI]  57.61,95.87 0 bottom
LOGO14  SFE_LOGO_NAME_FLAME.1_INCH  [SFE_LOGO_NAME_FLAME_.1]  48.61,98.87 0 top
LOGO15  SFE_LOGO_NAME_FLAME.1_INCH  [SFE_LOGO_NAME_FLAME_.1]  26.21,97.37 0 bottom
LOGO16  OSHW-LOGOMINI  [OSHW-LOGO-MINI]  117.62,95.87 0 bottom
LOGO17  SFE_LOGO_NAME_FLAME.1_INCH  [SFE_LOGO_NAME_FLAME_.1]  108.62,98.87 0 top
LOGO18  SFE_LOGO_NAME_FLAME.1_INCH  [SFE_LOGO_NAME_FLAME_.1]  86.22,97.37 0 bottom
LOGO19  OSHW-LOGOMINI  [OSHW-LOGO-MINI]  57.61,139.38 0 bottom
LOGO20  SFE_LOGO_NAME_FLAME.1_INCH  [SFE_LOGO_NAME_FLAME_.1]  48.61,142.38 0 top
LOGO21  SFE_LOGO_NAME_FLAME.1_INCH  [SFE_LOGO_NAME_FLAME_.1]  26.21,140.88 0 bottom
LOGO22  OSHW-LOGOMINI  [OSHW-LOGO-MINI]  117.62,139.38 0 bottom
LOGO23  SFE_LOGO_NAME_FLAME.1_INCH  [SFE_LOGO_NAME_FLAME_.1]  108.62,142.38 0 top
LOGO24  SFE_LOGO_NAME_FLAME.1_INCH  [SFE_LOGO_NAME_FLAME_.1]  86.22,140.88 0 bottom
MEAS1  JUMPER-COMBO_2_NC_TRACE  [COMBO-JUMPER_2_NC_TRACE]  103.62,16.86 0 bottom
MEAS2  JUMPER-COMBO_2_NC_TRACE  [COMBO-JUMPER_2_NC_TRACE]  43.61,16.86 0 bottom
MEAS3  JUMPER-COMBO_2_NC_TRACE  [COMBO-JUMPER_2_NC_TRACE]  43.61,60.37 0 bottom
MEAS4  JUMPER-COMBO_2_NC_TRACE  [COMBO-JUMPER_2_NC_TRACE]  103.62,60.37 0 bottom
MEAS5  JUMPER-COMBO_2_NC_TRACE  [COMBO-JUMPER_2_NC_TRACE]  43.61,103.87 0 bottom
MEAS6  JUMPER-COMBO_2_NC_TRACE  [COMBO-JUMPER_2_NC_TRACE]  103.62,103.87 0 bottom
MEAS7  JUMPER-COMBO_2_NC_TRACE  [COMBO-JUMPER_2_NC_TRACE]  43.61,147.38 0 bottom
MEAS8  JUMPER-COMBO_2_NC_TRACE  [COMBO-JUMPER_2_NC_TRACE]  103.62,147.38 0 bottom
Q1  MBT3904DW1T1  [SC70-6]  89.62,20.86 0 bottom
Q2  MBT3904DW1T1  [SC70-6]  29.61,20.86 0 bottom
Q3  SIL2308  [SOT26]  12.61,35.86 180 bottom
Q4  SIL2308  [SOT26]  72.62,35.86 180 bottom
Q5  MBT3904DW1T1  [SC70-6]  29.61,64.37 0 bottom
Q6  SIL2308  [SOT26]  12.61,79.37 180 bottom
Q7  MBT3904DW1T1  [SC70-6]  89.62,64.37 0 bottom
Q8  SIL2308  [SOT26]  72.62,79.37 180 bottom
Q9  MBT3904DW1T1  [SC70-6]  29.61,107.87 0 bottom
Q10  SIL2308  [SOT26]  12.61,122.87 180 bottom
Q11  MBT3904DW1T1  [SC70-6]  89.62,107.87 0 bottom
Q12  SIL2308  [SOT26]  72.62,122.87 180 bottom
Q13  MBT3904DW1T1  [SC70-6]  29.61,151.38 0 bottom
Q14  SIL2308  [SOT26]  12.61,166.38 180 bottom
Q15  MBT3904DW1T1  [SC70-6]  89.62,151.38 0 bottom
Q16  SIL2308  [SOT26]  72.62,166.38 180 bottom
R1  DNP  [0603]  32.61,36.86 270 bottom
R2  33  [1206_RA]  62.91,34.86 270 top
R3  33  [0603]  61.61,20.86 270 top
R4  33  [1206_RA]  37.61,32.86 270 top
R5  12k  [0603]  29.61,44.86 90 bottom
R6  1k  [0603]  39.61,14.36 180 bottom
R7  2.2k  [0603]  25.61,15.86 180 bottom
R8  0  [0603]  39.61,15.86 0 bottom
R9  33  [1206_RA]  62.91,27.86 270 top
R10  10k  [0603]  10.67,8.66 90 bottom
R11  1k  [0603]  12.61,32.86 270 top
R12  2.2k  [0603]  25.61,17.86 180 bottom
R13  1M  [0603]  22.61,43.66 180 bottom
R14  1k  [0603]  72.62,32.86 270 top
R15  27  [0603]  117.62,20.86 90 top
R16  100k  [0603]  17.61,45.36 180 bottom
R17  100k  [0603]  17.61,36.36 180 bottom
R18  100k  [0603]  17.61,39.36 0 bottom
R19  100k  [0603]  17.61,42.36 180 bottom
R20  10k  [0603]  34.61,20.86 90 bottom
R21  100k  [0603]  17.61,40.86 0 bottom
R22  10k  [0603]  12.61,30.86 180 bottom
R23  10k  [0603]  32.61,20.86 90 bottom
R24  300k  [0603]  9.91,31.86 270 bottom
R25  22  [0603]  28.91,40.36 180 bottom
R26  100k  [0603]  13.61,38.86 0 bottom
R27  27  [0603]  57.61,20.86 90 top
R28  27  [0603]  55.61,20.86 90 top
R29  10k  [0603]  27.61,20.86 270 bottom
R30  150k  [0603]  10.67,11.96 270 bottom
R31  10k  [0603]  13.61,40.86 0 bottom
R32  22  [0603]  28.91,41.96 180 bottom
R33  20k  [0603]  10.61,15.86 90 top
R34  10k  [0603]  10.61,19.86 90 top
R35  33  [0603]  51.07,22.86 270 bottom
R36  33  [0603]  49.07,22.86 270 bottom
R37  33  [0603]  55.07,22.86 270 bottom
R38  33  [0603]  53.07,22.86 270 bottom
R39  27  [0603]  53.07,42.86 270 bottom
R40  27  [0603]  51.07,42.86 270 bottom
R41  33  [0603]  47.07,42.86 90 bottom
R42  33  [0603]  49.07,42.86 90 bottom
R43  100  [0603]  58.11,41.86 0 top
R44  10  [0402-TIGHT]  54.11,41.86 0 top
R45  27  [0603]  115.62,20.86 90 top
R46  33  [1206_RA]  122.92,27.86 270 top
R47  33  [1206_RA]  122.92,34.86 270 top
R48  33  [0603]  121.62,20.86 270 top
R49  10k  [0603]  94.62,20.86 90 bottom
R50  10k  [0603]  92.62,20.86 90 bottom
R51  10k  [0603]  87.62,20.86 270 bottom
R52  33  [1206_RA]  97.62,32.86 270 top
R53  1k  [0603]  99.62,14.36 180 bottom
R54  150k  [0603]  70.68,11.96 270 bottom
R55  0  [0603]  99.62,15.86 0 bottom
R56  10k  [0603]  70.68,8.66 90 bottom
R57  2.2k  [0603]  85.62,15.86 180 bottom
R58  2.2k  [0603]  85.62,17.86 180 bottom
R59  10k  [0603]  72.62,30.86 180 bottom
R60  300k  [0603]  69.92,31.86 270 bottom
R61  100k  [0603]  73.62,38.86 0 bottom
R62  10k  [0603]  73.62,40.86 0 bottom
R63  DNP  [0603]  92.62,36.86 270 bottom
R64  12k  [0603]  89.62,44.86 90 bottom
R65  1M  [0603]  82.62,43.66 180 bottom
R66  100k  [0603]  77.62,45.36 180 bottom
R67  100k  [0603]  77.62,36.36 180 bottom
R68  100k  [0603]  77.62,39.36 0 bottom
R69  100k  [0603]  77.62,42.36 180 bottom
R70  100k  [0603]  77.62,40.86 0 bottom
R71  22  [0603]  88.92,40.36 180 bottom
R72  22  [0603]  88.92,41.96 180 bottom
R73  20k  [0603]  70.62,15.86 90 top
R74  10k  [0603]  70.62,19.86 90 top
R75  33  [0603]  111.08,22.86 270 bottom
R76  33  [0603]  109.08,22.86 270 bottom
R77  33  [0603]  115.08,22.86 270 bottom
R78  33  [0603]  113.08,22.86 270 bottom
R79  27  [0603]  113.08,42.86 270 bottom
R80  27  [0603]  111.08,42.86 270 bottom
R81  33  [0603]  107.08,42.86 90 bottom
R82  33  [0603]  109.08,42.86 90 bottom
R83  10  [0402-TIGHT]  114.12,41.86 0 top
R84  100  [0603]  118.12,41.86 0 top
R85  1k  [0603]  12.61,76.37 270 top
R86  27  [0603]  57.61,64.37 90 top
R87  27  [0603]  55.61,64.37 90 top
R88  33  [1206_RA]  62.91,71.37 270 top
R89  33  [1206_RA]  62.91,78.37 270 top
R90  33  [0603]  61.61,64.37 270 top
R91  10k  [0603]  34.61,64.37 90 bottom
R92  10k  [0603]  32.61,64.37 90 bottom
R93  10k  [0603]  27.61,64.37 270 bottom
R94  33  [1206_RA]  37.61,76.37 270 top
R95  1k  [0603]  39.61,57.87 180 bottom
R96  150k  [0603]  10.67,55.47 270 bottom
R97  0  [0603]  39.61,59.37 0 bottom
R98  10k  [0603]  10.67,52.17 90 bottom
R99  2.2k  [0603]  25.61,59.37 180 bottom
R100  2.2k  [0603]  25.61,61.37 180 bottom
R101  10k  [0603]  12.61,74.37 180 bottom
R102  300k  [0603]  9.91,75.37 270 bottom
R103  100k  [0603]  13.61,82.37 0 bottom
R104  10k  [0603]  13.61,84.37 0 bottom
R105  DNP  [0603]  32.61,80.37 270 bottom
R106  12k  [0603]  29.61,88.37 90 bottom
R107  1M  [0603]  22.61,87.17 180 bottom
R108  100k  [0603]  17.61,88.87 180 bottom
R109  100k  [0603]  17.61,79.87 180 bottom
R110  100k  [0603]  17.61,82.87 0 bottom
R111  100k  [0603]  17.61,85.87 180 bottom
R112  100k  [0603]  17.61,84.37 0 bottom
R113  22  [0603]  28.91,83.87 180 bottom
R114  22  [0603]  28.91,85.47 180 bottom
R115  20k  [0603]  10.61,59.37 90 top
R116  10k  [0603]  10.61,63.37 90 top
R117  33  [0603]  51.07,66.37 270 bottom
R118  33  [0603]  49.07,66.37 270 bottom
R119  33  [0603]  55.07,66.37 270 bottom
R120  33  [0603]  53.07,66.37 270 bottom
R121  27  [0603]  53.07,86.37 270 bottom
R122  27  [0603]  51.07,86.37 270 bottom
R123  33  [0603]  47.07,86.37 90 bottom
R124  33  [0603]  49.07,86.37 90 bottom
R125  10  [0402-TIGHT]  54.11,85.37 0 top
R126  100  [0603]  58.11,85.37 0 top
R127  1k  [0603]  72.62,76.37 270 top
R128  27  [0603]  117.62,64.37 90 top
R129  27  [0603]  115.62,64.37 90 top
R130  33  [1206_RA]  122.92,71.37 270 top
R131  33  [1206_RA]  122.92,78.37 270 top
R132  33  [0603]  121.62,64.37 270 top
R133  10k  [0603]  94.62,64.37 90 bottom
R134  10k  [0603]  92.62,64.37 90 bottom
R135  10k  [0603]  87.62,64.37 270 bottom
R136  33  [1206_RA]  97.62,76.37 270 top
R137  1k  [0603]  99.62,57.87 180 bottom
R138  150k  [0603]  70.68,55.47 270 bottom
R139  0  [0603]  99.62,59.37 0 bottom
R140  10k  [0603]  70.68,52.17 90 bottom
R141  2.2k  [0603]  85.62,59.37 180 bottom
R142  2.2k  [0603]  85.62,61.37 180 bottom
R143  10k  [0603]  72.62,74.37 180 bottom
R144  300k  [0603]  69.92,75.37 270 bottom
R145  100k  [0603]  73.62,82.37 0 bottom
R146  10k  [0603]  73.62,84.37 0 bottom
R147  DNP  [0603]  92.62,80.37 270 bottom
R148  12k  [0603]  89.62,88.37 90 bottom
R149  1M  [0603]  82.62,87.17 180 bottom
R150  100k  [0603]  77.62,88.87 180 bottom
R151  100k  [0603]  77.62,79.87 180 bottom
R152  100k  [0603]  77.62,82.87 0 bottom
R153  100k  [0603]  77.62,85.87 180 bottom
R154  100k  [0603]  77.62,84.37 0 bottom
R155  22  [0603]  88.92,83.87 180 bottom
R156  22  [0603]  88.92,85.47 180 bottom
R157  20k  [0603]  70.62,59.37 90 top
R158  10k  [0603]  70.62,63.37 90 top
R159  33  [0603]  111.08,66.37 270 bottom
R160  33  [0603]  109.08,66.37 270 bottom
R161  33  [0603]  115.08,66.37 270 bottom
R162  33  [0603]  113.08,66.37 270 bottom
R163  27  [0603]  113.08,86.37 270 bottom
R164  27  [0603]  111.08,86.37 270 bottom
R165  33  [0603]  107.08,86.37 90 bottom
R166  33  [0603]  109.08,86.37 90 bottom
R167  10  [0402-TIGHT]  114.12,85.37 0 top
R168  100  [0603]  118.12,85.37 0 top
R169  1k  [0603]  12.61,119.87 270 top
R170  27  [0603]  57.61,107.87 90 top
R171  27  [0603]  55.61,107.87 90 top
R172  33  [1206_RA]  62.91,114.87 270 top
R173  33  [1206_RA]  62.91,121.87 270 top
R174  33  [0603]  61.61,107.87 270 top
R175  10k  [0603]  34.61,107.87 90 bottom
R176  10k  [0603]  32.61,107.87 90 bottom
R177  10k  [0603]  27.61,107.87 270 bottom
R178  33  [1206_RA]  37.61,119.87 270 top
R179  1k  [0603]  39.61,101.37 180 bottom
R180  150k  [0603]  10.67,98.97 270 bottom
R181  0  [0603]  39.61,102.87 0 bottom
R182  10k  [0603]  10.67,95.67 90 bottom
R183  2.2k  [0603]  25.61,102.87 180 bottom
R184  2.2k  [0603]  25.61,104.87 180 bottom
R185  10k  [0603]  12.61,117.87 180 bottom
R186  300k  [0603]  9.91,118.87 270 bottom
R187  100k  [0603]  13.61,125.87 0 bottom
R188  10k  [0603]  13.61,127.87 0 bottom
R189  DNP  [0603]  32.61,123.87 270 bottom
R190  12k  [0603]  29.61,131.87 90 bottom
R191  1M  [0603]  22.61,130.67 180 bottom
R192  100k  [0603]  17.61,132.37 180 bottom
R193  100k  [0603]  17.61,123.37 180 bottom
R194  100k  [0603]  17.61,126.37 0 bottom
R195  100k  [0603]  17.61,129.37 180 bottom
R196  100k  [0603]  17.61,127.87 0 bottom
R197  22  [0603]  28.91,127.37 180 bottom
R198  22  [0603]  28.91,128.97 180 bottom
R199  20k  [0603]  10.61,102.87 90 top
R200  10k  [0603]  10.61,106.87 90 top
R201  33  [0603]  51.07,109.87 270 bottom
R202  33  [0603]  49.07,109.87 270 bottom
R203  33  [0603]  55.07,109.87 270 bottom
R204  33  [0603]  53.07,109.87 270 bottom
R205  27  [0603]  53.07,129.87 270 bottom
R206  27  [0603]  51.07,129.87 270 bottom
R207  33  [0603]  47.07,129.87 90 bottom
R208  33  [0603]  49.07,129.87 90 bottom
R209  10  [0402-TIGHT]  54.11,128.87 0 top
R210  100  [0603]  58.11,128.87 0 top
R211  1k  [0603]  72.62,119.87 270 top
R212  27  [0603]  117.62,107.87 90 top
R213  27  [0603]  115.62,107.87 90 top
R214  33  [1206_RA]  122.92,114.87 270 top
R215  33  [1206_RA]  122.92,121.87 270 top
R216  33  [0603]  121.62,107.87 270 top
R217  10k  [0603]  94.62,107.87 90 bottom
R218  10k  [0603]  92.62,107.87 90 bottom
R219  10k  [0603]  87.62,107.87 270 bottom
R220  33  [1206_RA]  97.62,119.87 270 top
R221  1k  [0603]  99.62,101.37 180 bottom
R222  150k  [0603]  70.68,98.97 270 bottom
R223  0  [0603]  99.62,102.87 0 bottom
R224  10k  [0603]  70.68,95.67 90 bottom
R225  2.2k  [0603]  85.62,102.87 180 bottom
R226  2.2k  [0603]  85.62,104.87 180 bottom
R227  10k  [0603]  72.62,117.87 180 bottom
R228  300k  [0603]  69.92,118.87 270 bottom
R229  100k  [0603]  73.62,125.87 0 bottom
R230  10k  [0603]  73.62,127.87 0 bottom
R231  DNP  [0603]  92.62,123.87 270 bottom
R232  12k  [0603]  89.62,131.87 90 bottom
R233  1M  [0603]  82.62,130.67 180 bottom
R234  100k  [0603]  77.62,132.37 180 bottom
R235  100k  [0603]  77.62,123.37 180 bottom
R236  100k  [0603]  77.62,126.37 0 bottom
R237  100k  [0603]  77.62,129.37 180 bottom
R238  100k  [0603]  77.62,127.87 0 bottom
R239  22  [0603]  88.92,127.37 180 bottom
R240  22  [0603]  88.92,128.97 180 bottom
R241  20k  [0603]  70.62,102.87 90 top
R242  10k  [0603]  70.62,106.87 90 top
R243  33  [0603]  111.08,109.87 270 bottom
R244  33  [0603]  109.08,109.87 270 bottom
R245  33  [0603]  115.08,109.87 270 bottom
R246  33  [0603]  113.08,109.87 270 bottom
R247  27  [0603]  113.08,129.87 270 bottom
R248  27  [0603]  111.08,129.87 270 bottom
R249  33  [0603]  107.08,129.87 90 bottom
R250  33  [0603]  109.08,129.87 90 bottom
R251  10  [0402-TIGHT]  114.12,128.87 0 top
R252  100  [0603]  118.12,128.87 0 top
R253  1k  [0603]  12.61,163.38 270 top
R254  27  [0603]  57.61,151.38 90 top
R255  27  [0603]  55.61,151.38 90 top
R256  33  [1206_RA]  62.91,158.38 270 top
R257  33  [1206_RA]  62.91,165.38 270 top
R258  33  [0603]  61.61,151.38 270 top
R259  10k  [0603]  34.61,151.38 90 bottom
R260  10k  [0603]  32.61,151.38 90 bottom
R261  10k  [0603]  27.61,151.38 270 bottom
R262  33  [1206_RA]  37.61,163.38 270 top
R263  1k  [0603]  39.61,144.88 180 bottom
R264  150k  [0603]  10.67,142.48 270 bottom
R265  0  [0603]  39.61,146.38 0 bottom
R266  10k  [0603]  10.67,139.18 90 bottom
R267  2.2k  [0603]  25.61,146.38 180 bottom
R268  2.2k  [0603]  25.61,148.38 180 bottom
R269  10k  [0603]  12.61,161.38 180 bottom
R270  300k  [0603]  9.91,162.38 270 bottom
R271  100k  [0603]  13.61,169.38 0 bottom
R272  10k  [0603]  13.61,171.38 0 bottom
R273  DNP  [0603]  32.61,167.38 270 bottom
R274  12k  [0603]  29.61,175.38 90 bottom
R275  1M  [0603]  22.61,174.18 180 bottom
R276  100k  [0603]  17.61,175.88 180 bottom
R277  100k  [0603]  17.61,166.88 180 bottom
R278  100k  [0603]  17.61,169.88 0 bottom
R279  100k  [0603]  17.61,172.88 180 bottom
R280  100k  [0603]  17.61,171.38 0 bottom
R281  22  [0603]  28.91,170.88 180 bottom
R282  22  [0603]  28.91,172.48 180 bottom
R283  20k  [0603]  10.61,146.38 90 top
R284  10k  [0603]  10.61,150.38 90 top
R285  33  [0603]  51.07,153.38 270 bottom
R286  33  [0603]  49.07,153.38 270 bottom
R287  33  [0603]  55.07,153.38 270 bottom
R288  33  [0603]  53.07,153.38 270 bottom
R289  27  [0603]  53.07,173.38 270 bottom
R290  27  [0603]  51.07,173.38 270 bottom
R291  33  [0603]  47.07,173.38 90 bottom
R292  33  [0603]  49.07,173.38 90 bottom
R293  10  [0402-TIGHT]  54.11,172.38 0 top
R294  100  [0603]  58.11,172.38 0 top
R295  1k  [0603]  72.62,163.38 270 top
R296  27  [0603]  117.62,151.38 90 top
R297  27  [0603]  115.62,151.38 90 top
R298  33  [1206_RA]  122.92,158.38 270 top
R299  33  [1206_RA]  122.92,165.38 270 top
R300  33  [0603]  121.62,151.38 270 top
R301  10k  [0603]  94.62,151.38 90 bottom
R302  10k  [0603]  92.62,151.38 90 bottom
R303  10k  [0603]  87.62,151.38 270 bottom
R304  33  [1206_RA]  97.62,163.38 270 top
R305  1k  [0603]  99.62,144.88 180 bottom
R306  150k  [0603]  70.68,142.48 270 bottom
R307  0  [0603]  99.62,146.38 0 bottom
R308  10k  [0603]  70.68,139.18 90 bottom
R309  2.2k  [0603]  85.62,146.38 180 bottom
R310  2.2k  [0603]  85.62,148.38 180 bottom
R311  10k  [0603]  72.62,161.38 180 bottom
R312  300k  [0603]  69.92,162.38 270 bottom
R313  100k  [0603]  73.62,169.38 0 bottom
R314  10k  [0603]  73.62,171.38 0 bottom
R315  DNP  [0603]  92.62,167.38 270 bottom
R316  12k  [0603]  89.62,175.38 90 bottom
R317  1M  [0603]  82.62,174.18 180 bottom
R318  100k  [0603]  77.62,175.88 180 bottom
R319  100k  [0603]  77.62,166.88 180 bottom
R320  100k  [0603]  77.62,169.88 0 bottom
R321  100k  [0603]  77.62,172.88 180 bottom
R322  100k  [0603]  77.62,171.38 0 bottom
R323  22  [0603]  88.92,170.88 180 bottom
R324  22  [0603]  88.92,172.48 180 bottom
R325  20k  [0603]  70.62,146.38 90 top
R326  10k  [0603]  70.62,150.38 90 top
R327  33  [0603]  111.08,153.38 270 bottom
R328  33  [0603]  109.08,153.38 270 bottom
R329  33  [0603]  115.08,153.38 270 bottom
R330  33  [0603]  113.08,153.38 270 bottom
R331  27  [0603]  113.08,173.38 270 bottom
R332  27  [0603]  111.08,173.38 270 bottom
R333  33  [0603]  107.08,173.38 90 bottom
R334  33  [0603]  109.08,173.38 90 bottom
R335  10  [0402-TIGHT]  114.12,172.38 0 top
R336  100  [0603]  118.12,172.38 0 top
TP1  TEST-POINT3X5  [PAD.03X.05]  57.39,43.07 180 bottom
TP2  [PAD.03X.05]  44.69,43.07 180 bottom
TP3  TEST-POINT3X5  [PAD.03X.05]  117.4,43.07 180 bottom
TP4  [PAD.03X.05]  104.7,43.07 180 bottom
TP5  TEST-POINT3X5  [PAD.03X.05]  57.39,86.58 180 bottom
TP6  [PAD.03X.05]  44.69,86.58 180 bottom
TP7  TEST-POINT3X5  [PAD.03X.05]  117.4,86.58 180 bottom
TP8  [PAD.03X.05]  104.7,86.58 180 bottom
TP9  TEST-POINT3X5  [PAD.03X.05]  57.39,130.08 180 bottom
TP10  [PAD.03X.05]  44.69,130.08 180 bottom
TP11  TEST-POINT3X5  [PAD.03X.05]  117.4,130.08 180 bottom
TP12  [PAD.03X.05]  104.7,130.08 180 bottom
TP13  TEST-POINT3X5  [PAD.03X.05]  57.39,173.59 180 bottom
TP14  [PAD.03X.05]  44.69,173.59 180 bottom
TP15  TEST-POINT3X5  [PAD.03X.05]  117.4,173.59 180 bottom
TP16  [PAD.03X.05]  104.7,173.59 180 bottom
U1  74HC4052D  [SO16]  24.61,37.86 180 top
U2  3.3V  [SOT23-5]  39.61,18.86 180 bottom
U3  U-BLOX_ZED-F9P  [ZED-F9P]  50.61,31.86 180 top
U4  STLQ015  [SOT23-5]  55.61,16.86 90 top
U5  ESP-WROOM-3232D  [ESP-WROOM-32D]  23.65,21.36 270 top
U6  CH340C  [SO016]  32.61,26.86 180 bottom
U7  MAX17048  [DFN-8]  45.61,19.86 90 bottom
U8  USB251XB  [QFN-36]  23.61,37.86 0 bottom
U9  U-BLOX_NEO-D9S-00B  [NEO-M9N/M8T/M8U/D9S]  53.15,32.86 90 bottom
U10  MCP73833  [DFN-10]  42.61,10.86 90 bottom
U11  3.3V  [SOT23-5]  99.62,18.86 180 bottom
U12  AP2112K-3.3  [SOT23-5]  35.61,36.86 0 bottom
U13  POWER-DIVIDER  [PD0922J5050S2HF_ANA]  58.11,43.38 0 top
U14  U-BLOX_ZED-F9P  [ZED-F9P]  110.62,31.86 180 top
U15  CH340C  [SO016]  92.62,26.86 180 bottom
U16  MAX17048  [DFN-8]  105.62,19.86 90 bottom
U17  MCP73833  [DFN-10]  102.62,10.86 90 bottom
U18  74HC4052D  [SO16]  84.62,37.86 180 top
U19  STLQ015  [SOT23-5]  115.62,16.86 90 top
U20  AP2112K-3.3  [SOT23-5]  95.62,36.86 0 bottom
U21  USB251XB  [QFN-36]  83.62,37.86 0 bottom
U22  ESP-WROOM-3232D  [ESP-WROOM-32D]  83.66,21.36 270 top
U23  U-BLOX_NEO-D9S-00B  [NEO-M9N/M8T/M8U/D9S]  113.16,32.86 90 bottom
U24  POWER-DIVIDER  [PD0922J5050S2HF_ANA]  118.12,43.38 0 top
U25  3.3V  [SOT23-5]  39.61,62.37 180 bottom
U26  U-BLOX_ZED-F9P  [ZED-F9P]  50.61,75.37 180 top
U27  CH340C  [SO016]  32.61,70.37 180 bottom
U28  MAX17048  [DFN-8]  45.61,63.37 90 bottom
U29  MCP73833  [DFN-10]  42.61,54.37 90 bottom
U30  74HC4052D  [SO16]  24.61,81.37 180 top